# Altium PCB Rev(5).PCBDOC (part 1 of 3)
Units mm, origin at the board's own origin, x right, y up, seen from the top; angles counter-clockwise.
Board outline 161.79 x 99.5 mm, 4 copper layers (Top Layer, InternalPlane1, InternalPlane2, Bottom Layer); 374 components, 275 nets, 1404 pads, 444 vias.
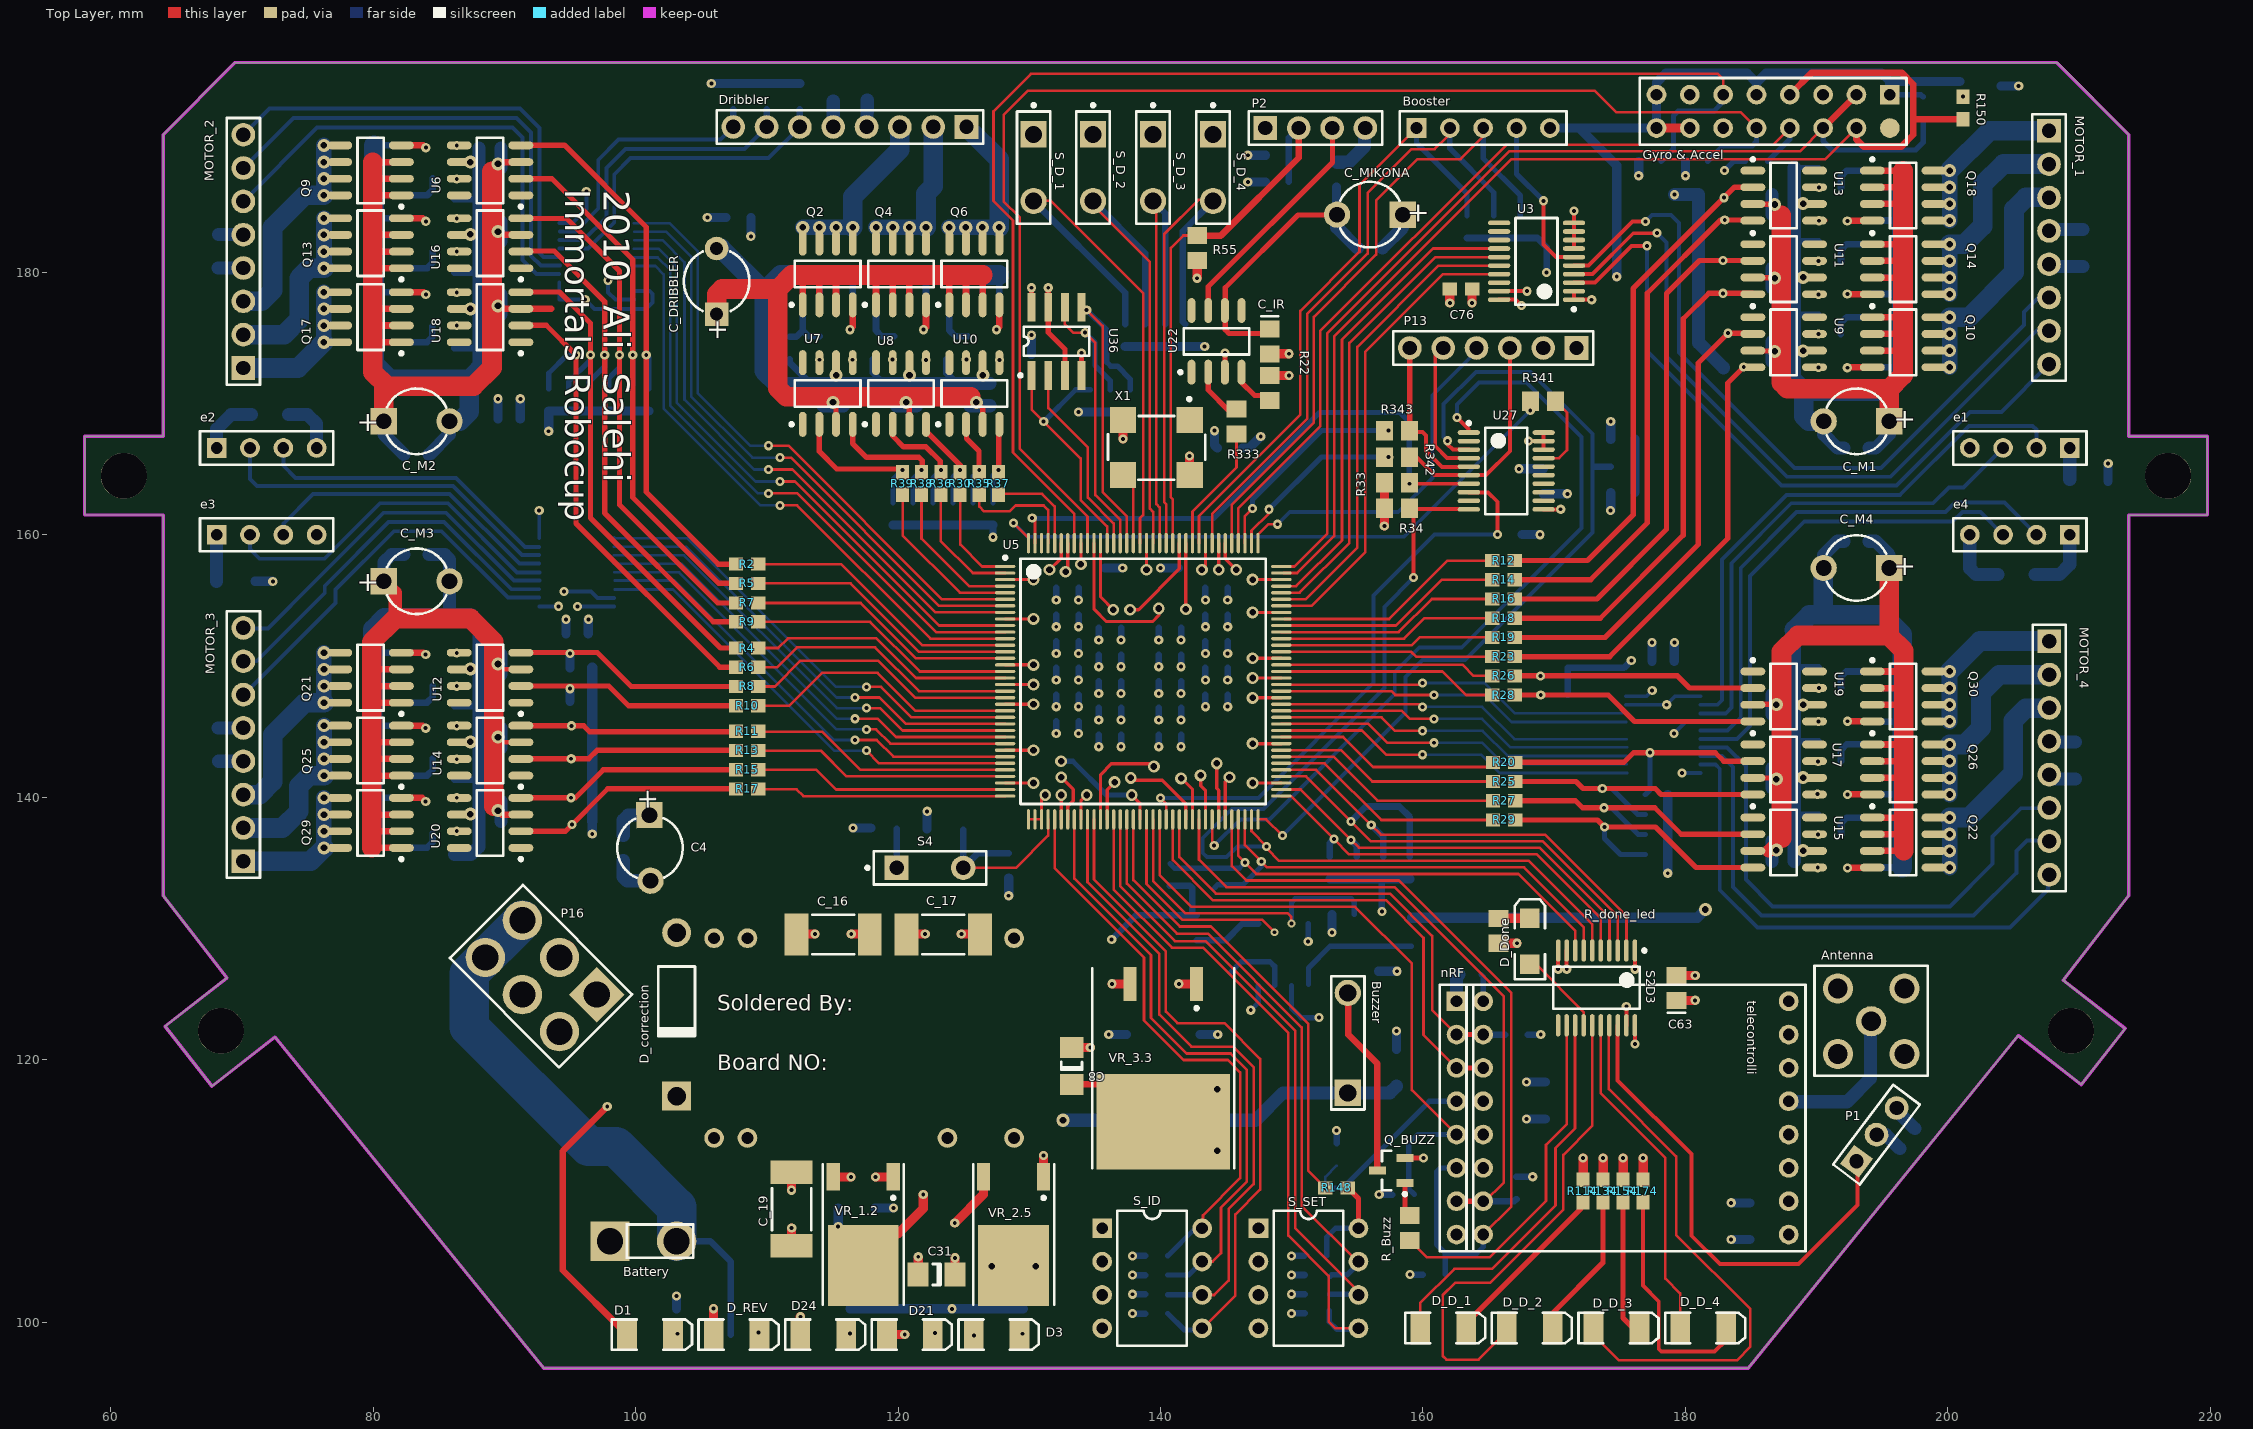
[diagram p0: Top Layer view]
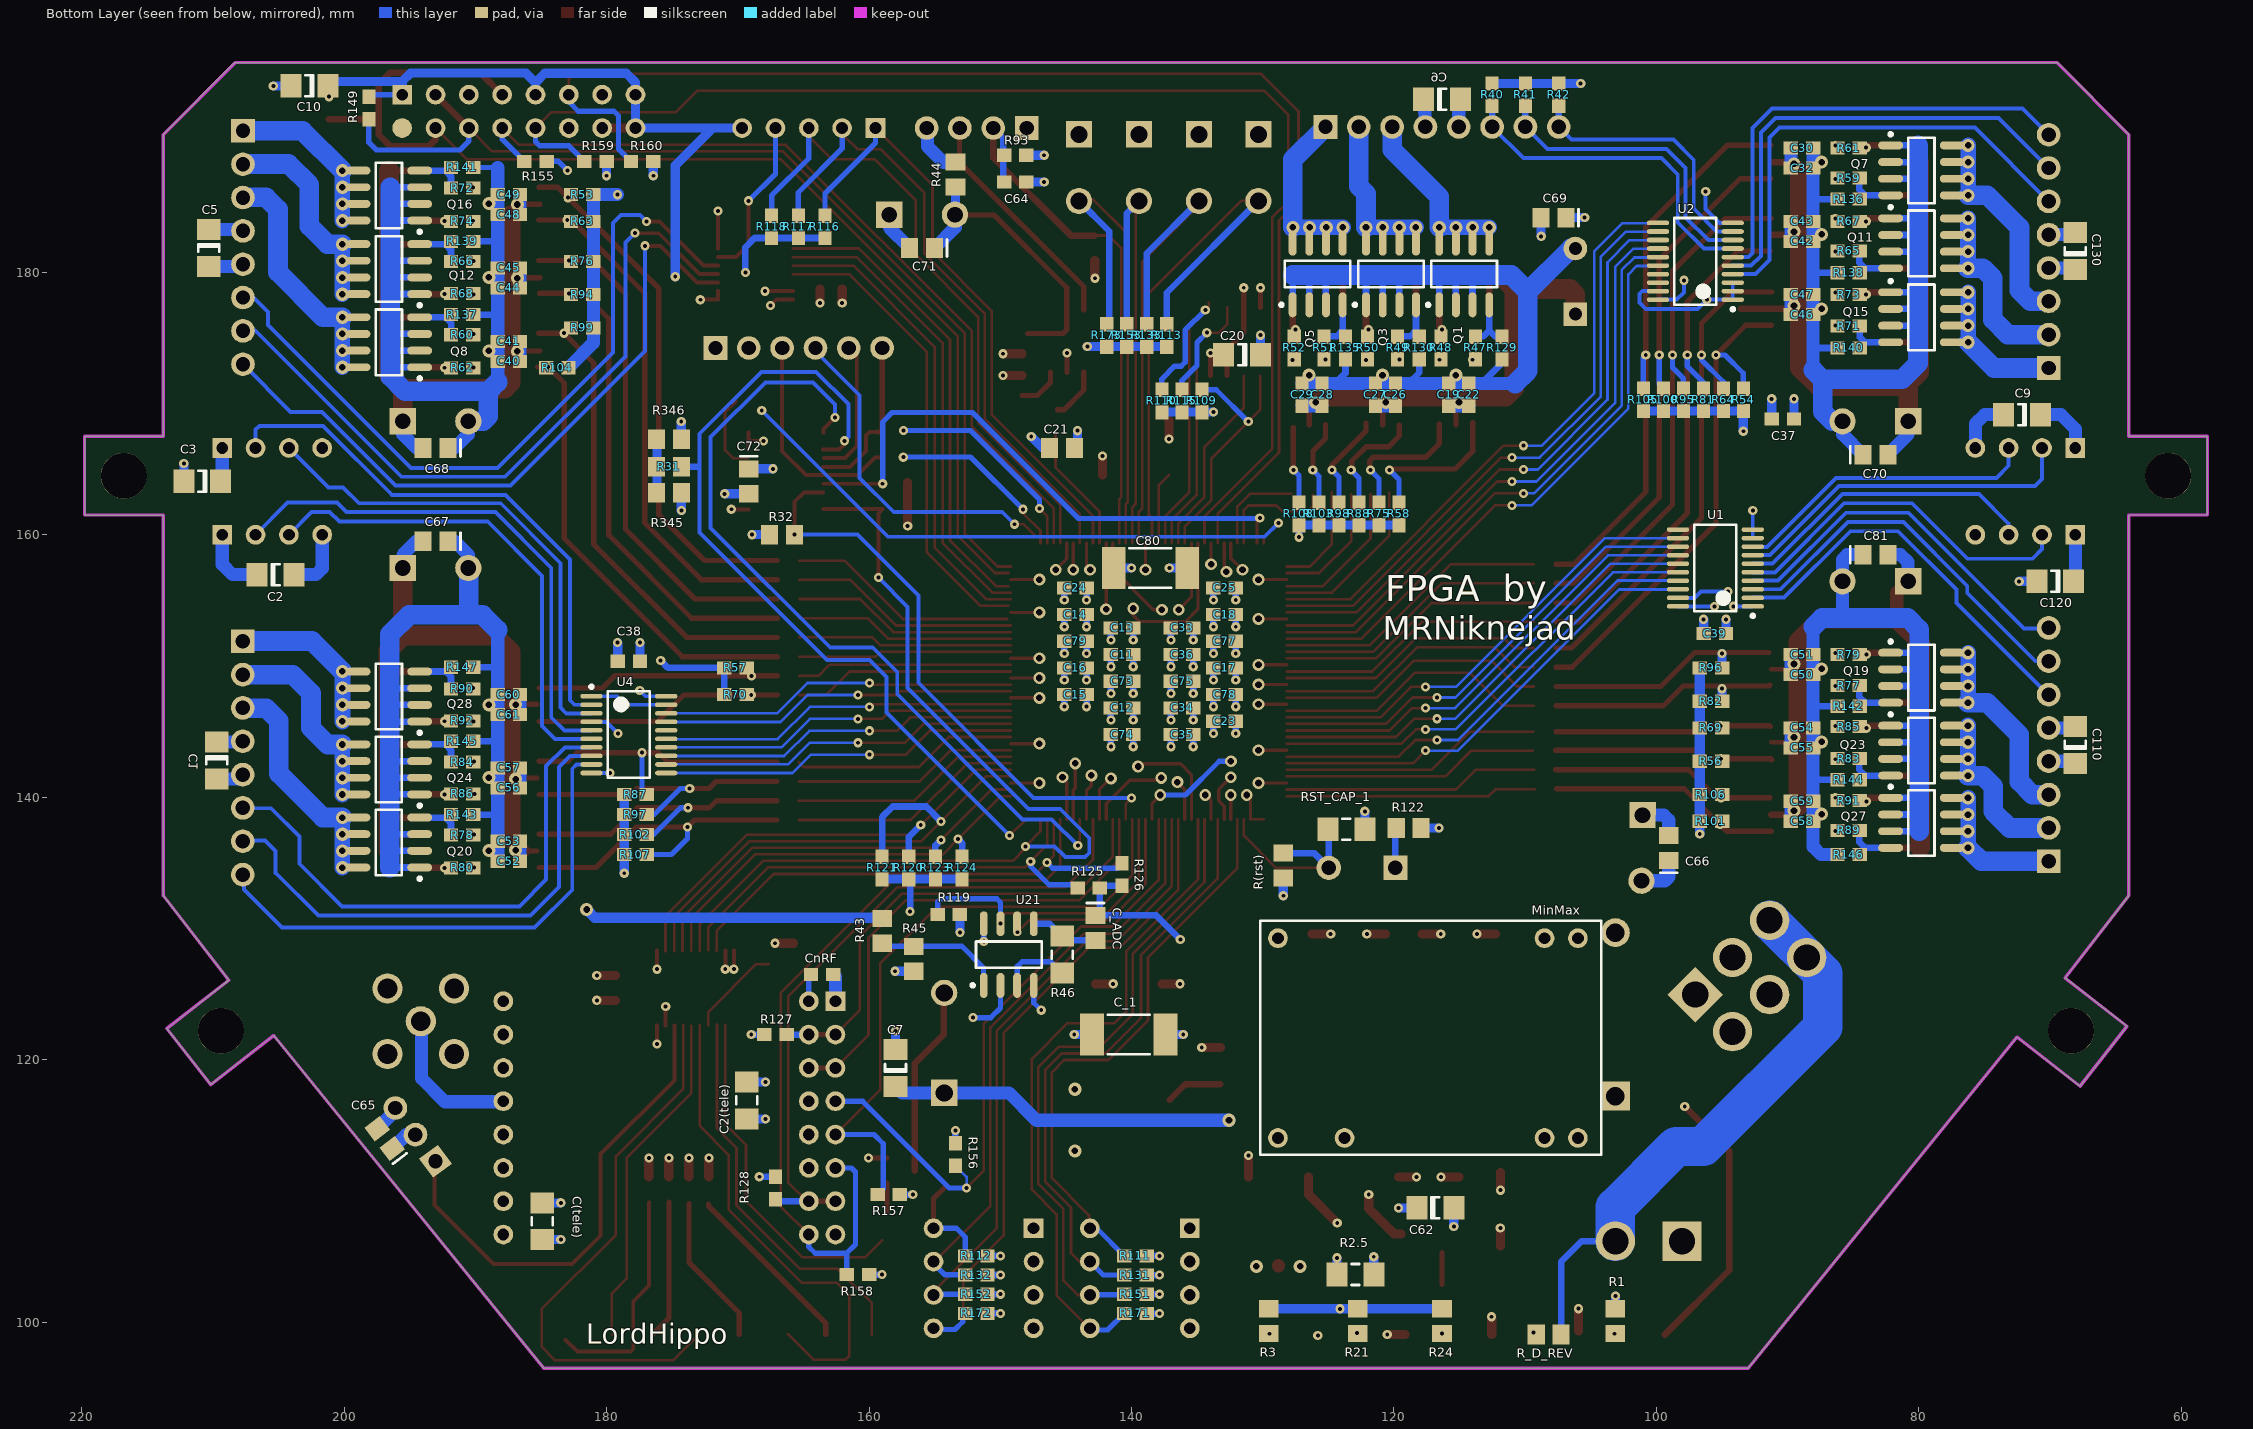
[diagram p1: Bottom Layer view, seen from below]
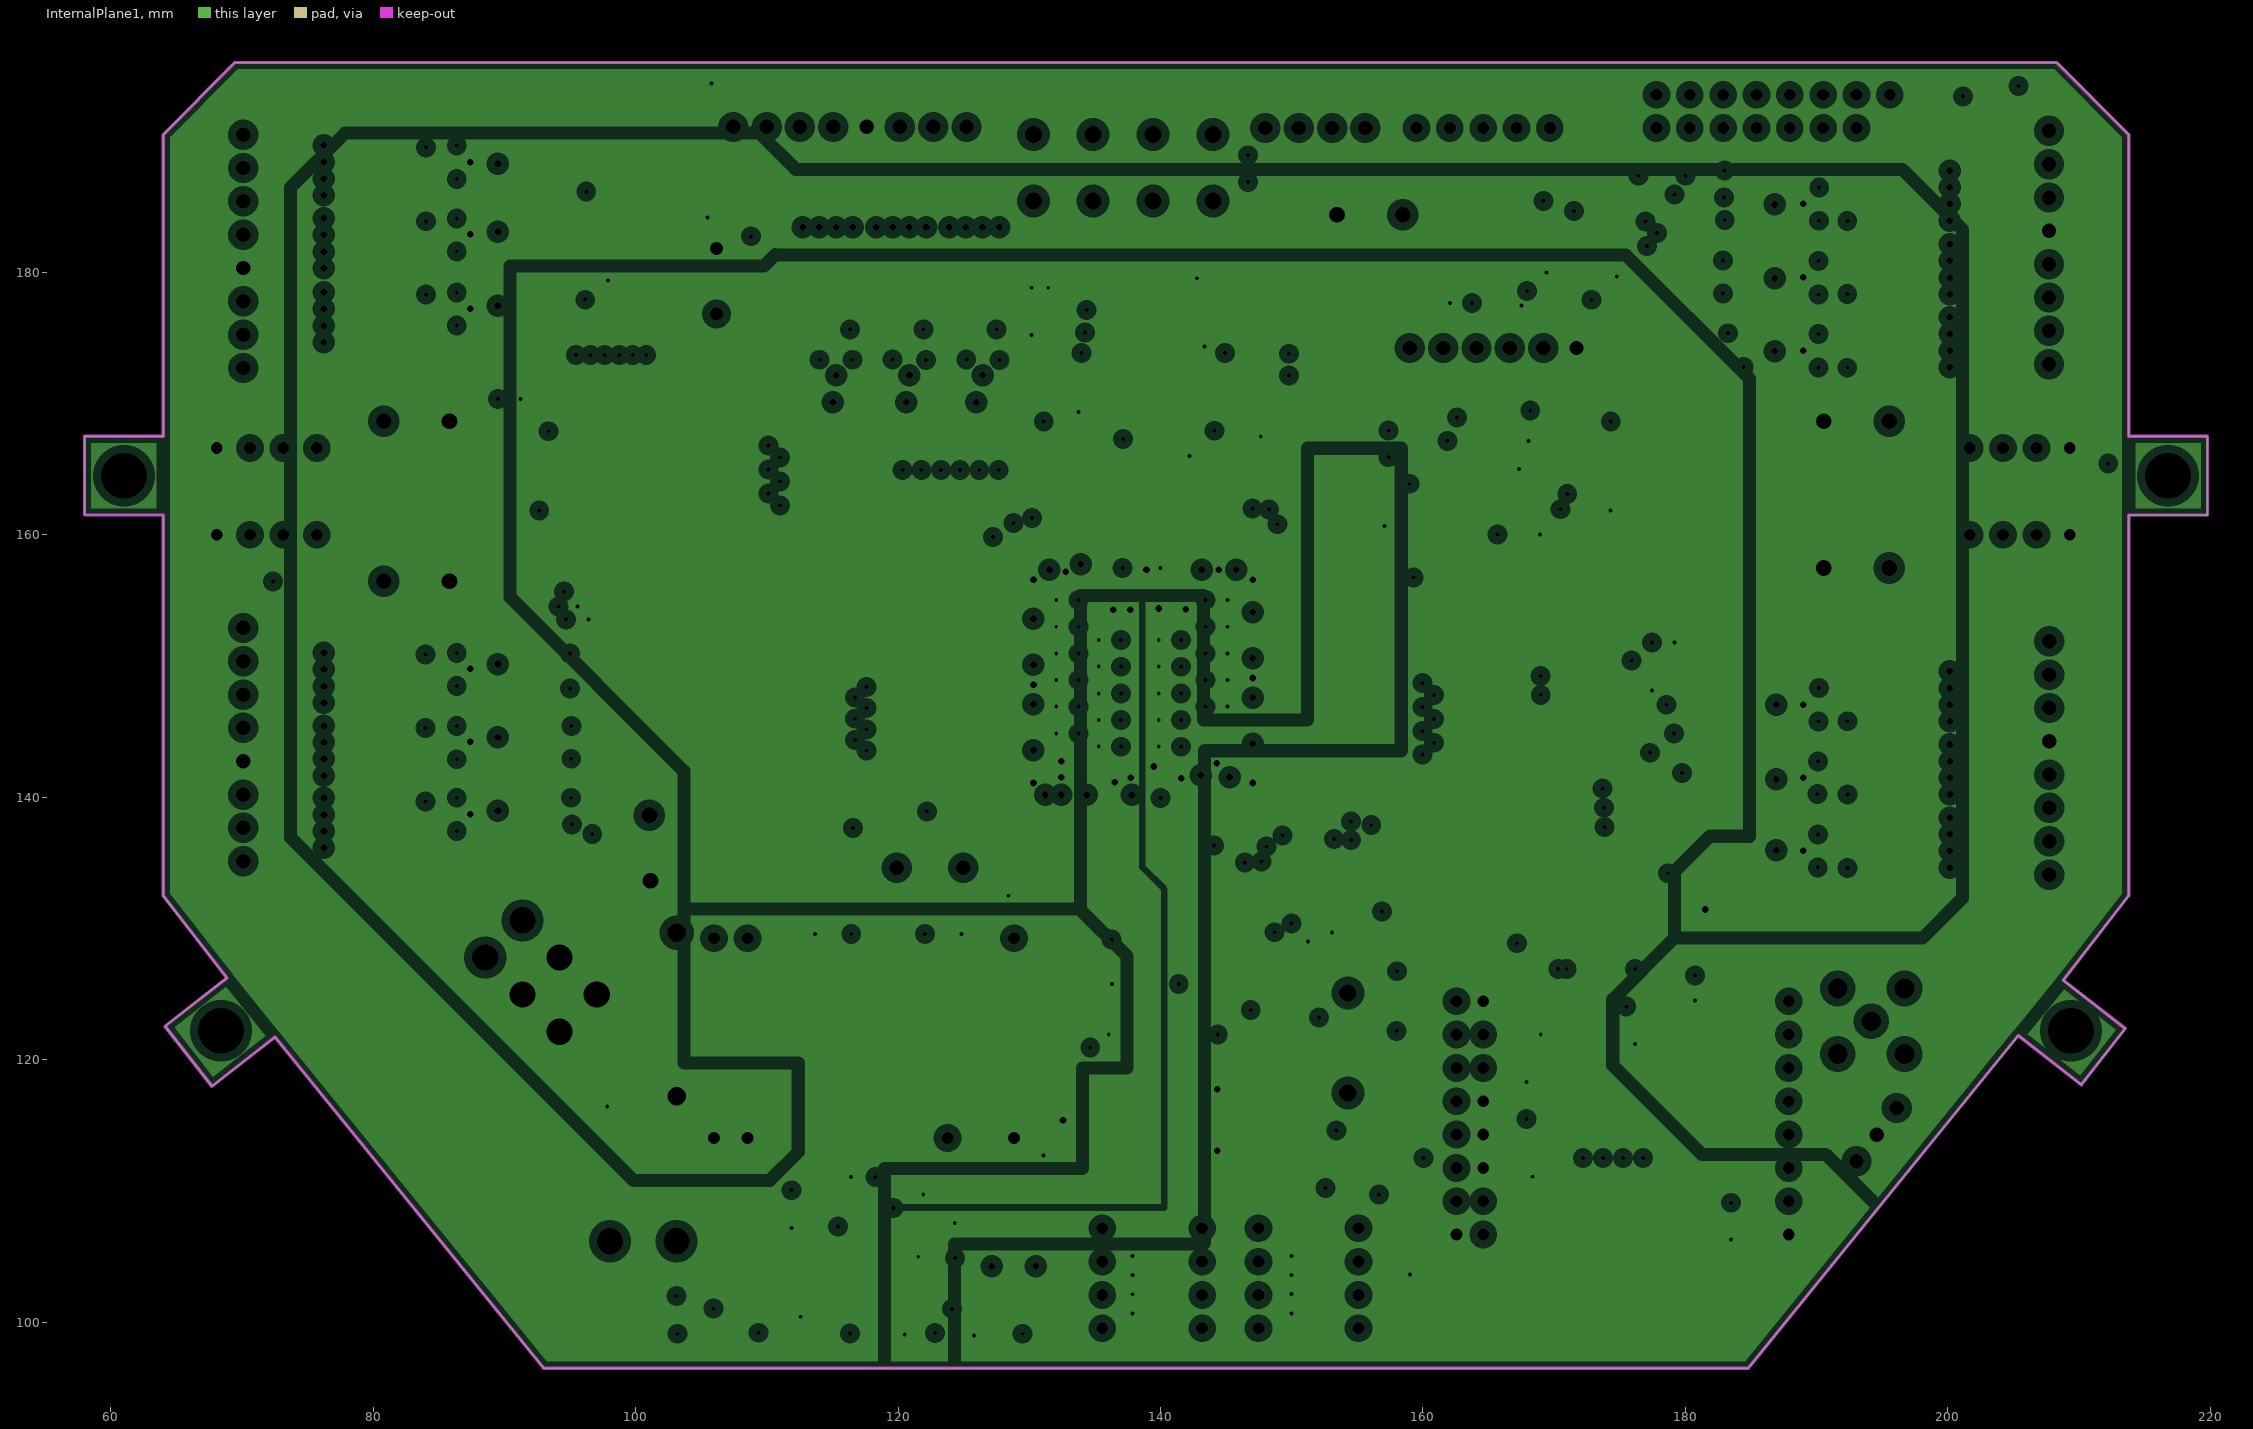
[diagram p2: InternalPlane1, clearances drawn from the general rule]
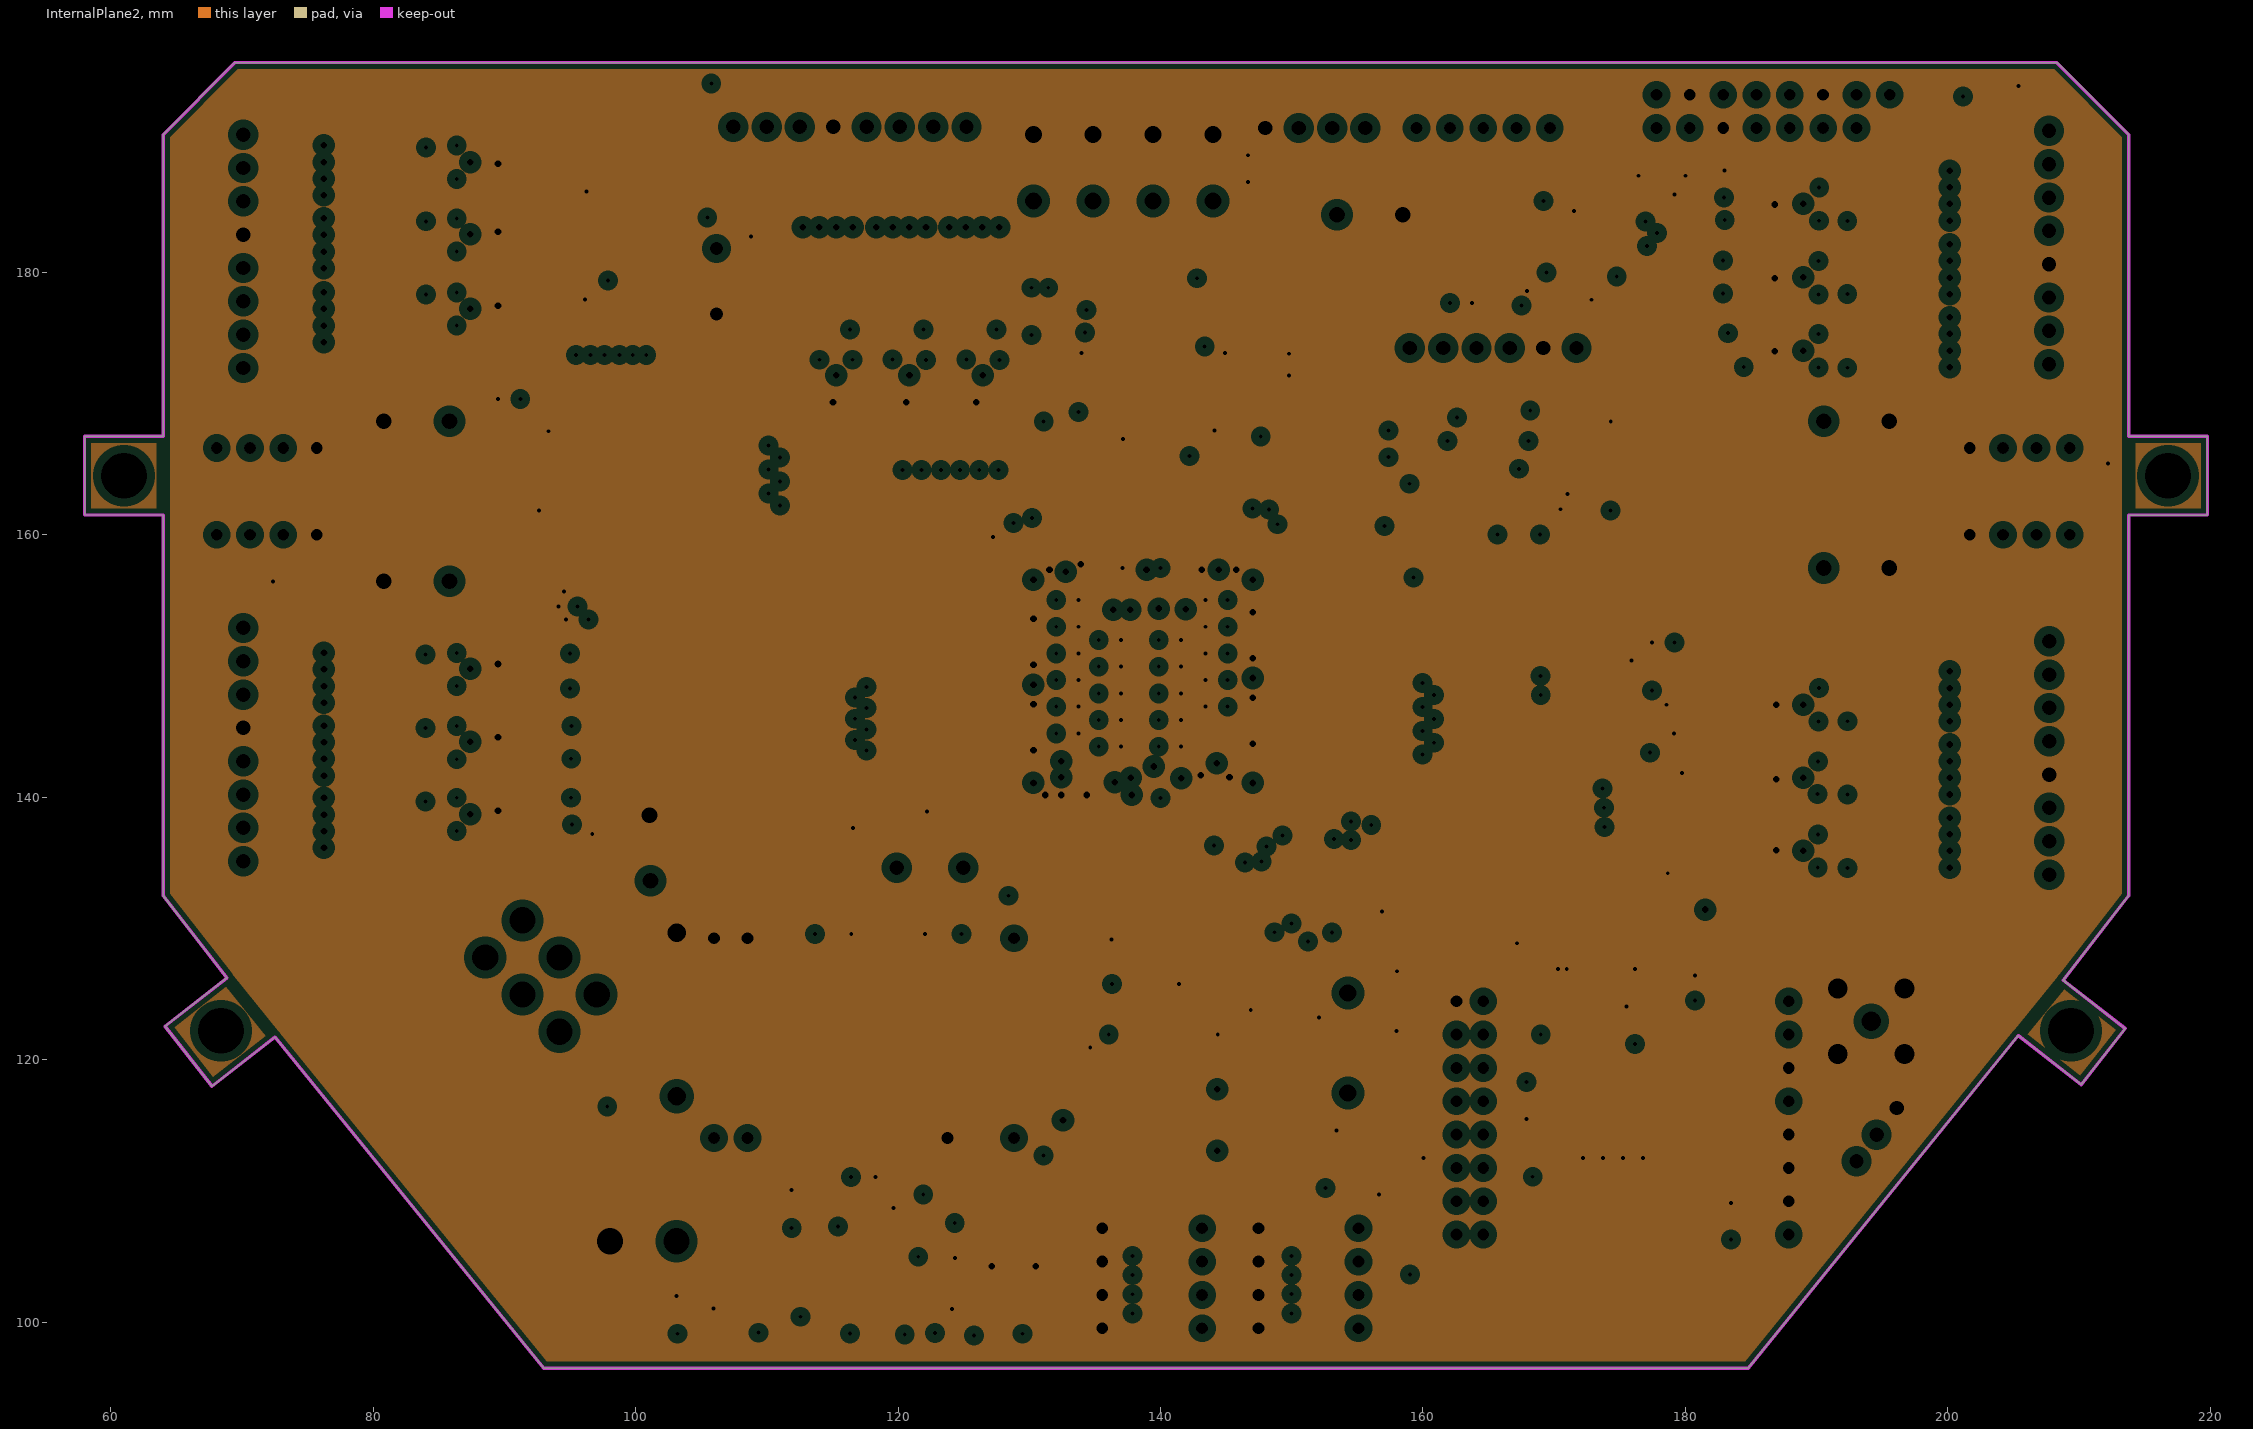
[diagram p3: InternalPlane2, clearances drawn from the general rule]

## Layer stack, top to bottom
Top Layer: signal copper 0.0356
Dielectric: core 0.32, FR-4, Dk 4.8
InternalPlane1: plane copper 0.0356, net (Multiple Nets)
Dielectric: prepreg 0.32, FR-4, Dk 4.8
InternalPlane2: plane copper 0.0356, net GND
Dielectric: core 0.32, FR-4, Dk 4.8
Bottom Layer: signal copper 0.0356

## Board outline
69.436,195.99 208.34,196 213.79,190.51 213.79,167.51 219.79,167.51 219.79,161.51 213.79,161.51 213.79,132.51 208.795,126.068 213.516,122.385 210.176,118.103 205.376,121.847 184.79,96.5 93,96.5 72.51,121.728 67.708,117.982 64.139,122.557 68.86,126.24 64,132.5 64,161.51 58,161.53 58,167.51 64,167.51 64,190.51

## Design rules (kind name [scope] priority, off if disabled: settings)
Clearance [InLCC] p1: gap=0.2
Clearance Clearance_1 [All] p2: gap=0.25
ComponentClearance [All] p1: gap=0.254 collisioncheckmode=3 verticalgap=0.254
HoleSize [All] p1: absolutevalues=TRUE maxlimit=4.54 minlimit=0.025 maxpercent=80.000 minpercent=20.000
PlaneClearance [All] p1: clearance=0.608
PlaneConnect PlaneConnect_1 [(ObjectKind = 'Via') And (ViaDiameter = '0.99')] p1: planeconnectstyle=NoConnect reliefexpansion=0.508 reliefentries=4 reliefconductorwidth=0.254 reliefairgap=0.254
PlaneConnect [All] p2: planeconnectstyle=Relief reliefexpansion=0.508 reliefentries=4 reliefconductorwidth=1 reliefairgap=0.254
PolygonConnect [All] p1: connectstyle=Relief reliefconductorwidth=0.74 reliefentries=4 polygonreliefangle="90 Angle"
RoomDefinition Sheet1 [InComponentClass('Sheet1')] p1: confinementstyle=ConfineIn formatcopy=TRUE lockcomponents=FALSE outline 227.95,77.61 238.11,77.61 238.11,90.3 227.95,90.3
RoutingVias [All] p1: holewidth=0.45 width=0.75 viastyle="Through Hole" minholewidth=0.3 minwidth=0.5 maxholewidth=0.7 maxwidth=1
SMDNeckDown [All] p1: percent=70.000
SolderMaskExpansion [All] p1: expansion=0.102
SupplyNets [All] p1: voltage=14.80
TestPointUsage [All] p1: valid=0 allowmultiple=FALSE
Testpoint [All] p1: side=15 testpointundercomponent=TRUE minsize=1.016 maxsize=2.54 preferedsize=1.524 minholesize=0 maxholesize=1.016 preferedholesize=0.813 testpointgrid=0.025 style=1023 order=0123456789
Width [All] p1: maxlimit=4 minlimit=0.2 preferedwidth=0.4 toplayer_prefwidth=0.2 bottomlayer_prefwidth=0.2 minimp=50.000000 maximp=50.000000 favimp=50.000000
15 further rules are at their usual default settings.

## Components (designator, comment, footprint, x,y, rotation, side; value= is the part's Value field where it differs from the comment)
Antenna "Header 5" Antenna 194.11,122.936 r0 top
Battery "Header 2" HDR1X2 100.584,106.172 r0 top
Booster "Header 5" HDR1X5 159.512,191.008 r0 top
Buzzer "Header 4" HDR1X4#1 154.272,117.478 r90 top
C1 "100nF" C1206 209.724,142.808 r270 bottom
C2 "100nF" C1206 205.232,156.972 r180 bottom
C2(tele) "Cap" 3216[1206] 169.316,116.896 r270 bottom
C3 "100nF" C1206 210.82,164.084 r0 bottom
C4 "CRip4" CAPPR5-5x5#1 101.092,136.144 r271 top
C5 "100nF" C1206 210.312,181.864 r270 bottom
C6 "100nF" C1206 116.332,193.2 r180 bottom
C7 "100nF" C1206 157.988,119.38 r90 bottom
C8 "CNoise8" C1206 133.222,119.53 r90 top
C9 "100nF" C1206 72.136,169.164 r0 bottom
C10 "100nF" C1206 202.648,194.218 r0 bottom
C11 "Cap Semi" 1608[0603] 140.716,150.876 r180 bottom
C12 "Cap Semi" 1608[0603] 140.716,146.812 r180 bottom
C13 "Cap Semi" 1608[0603] 140.716,152.908 r180 bottom
C14 "Cap Semi" 1608[0603] 144.272,153.924 r0 bottom
C15 "Cap Semi" 1608[0603] 144.272,147.828 r0 bottom
C16 "Cap Semi" 1608[0603] 144.272,149.86 r0 bottom
C17 "Cap Semi" 1608[0603] 132.906,149.86 r180 bottom
C18 "Cap Semi" 1608[0603] 132.906,153.924 r180 bottom
C19 "Cap Semi" 1608[0603] 115.824,170.688 r90 bottom
C20 "100nF" C1206 131.572,173.736 r0 bottom
C21 "100nf" 2012[0805] 145.288,166.624 r180 bottom
C22 "Cap Semi" 1608[0603] 114.3,170.688 r90 bottom
C23 "Cap Semi" 1608[0603] 132.906,145.796 r180 bottom
C24 "Cap Semi" 1608[0603] 144.272,155.956 r0 bottom
C25 "Cap Semi" 1608[0603] 132.906,155.956 r180 bottom
C26 "Cap Semi" 1608[0603] 119.888,170.688 r90 bottom
C27 "Cap Semi" 1608[0603] 121.412,170.688 r90 bottom
C28 "Cap Semi" 1608[0603] 125.476,170.688 r90 bottom
C29 "Cap Semi" 1608[0603] 127,170.688 r90 bottom
C30 "Cap Semi" 1608[0603] 88.9,189.484 r180 bottom
C31 "CNoise6" C1206 122.936,103.632 r180 top
C32 "Cap Semi" 1608[0603] 88.9,187.96 r180 bottom
C33 "Cap Semi" 1608[0603] 136.144,152.908 r180 bottom
C34 "Cap Semi" 1608[0603] 136.144,146.812 r180 bottom
C35 "Cap Semi" 1608[0603] 136.144,144.78 r180 bottom
C36 "Cap Semi" 1608[0603] 136.144,150.876 r180 bottom
C37 "Cap Semi" 1608[0603] 90.36,168.824 r0 bottom
C38 "Cap Semi" 1608[0603] 178.308,150.368 r0 bottom
C39 "Cap Semi" 1608[0603] 95.544,152.472 r0 bottom
C40 "Cap Semi" 1608[0603] 187.452,173.228 r0 bottom
C41 "Cap Semi" 1608[0603] 187.452,174.752 r0 bottom
C42 "Cap Semi" 1608[0603] 88.9,182.372 r180 bottom
C43 "Cap Semi" 1608[0603] 88.9,183.896 r180 bottom
C44 "Cap Semi" 1608[0603] 187.452,178.816 r0 bottom
C45 "Cap Semi" 1608[0603] 187.452,180.34 r0 bottom
C46 "Cap Semi" 1608[0603] 88.9,176.784 r180 bottom
C47 "Cap Semi" 1608[0603] 88.9,178.308 r180 bottom
C48 "Cap Semi" 1608[0603] 187.452,184.404 r0 bottom
C49 "Cap Semi" 1608[0603] 187.452,185.928 r0 bottom
C50 "Cap Semi" 1608[0603] 88.9,149.352 r180 bottom
C51 "Cap Semi" 1608[0603] 88.9,150.876 r180 bottom
C52 "Cap Semi" 1608[0603] 187.452,135.128 r0 bottom
C53 "Cap Semi" 1608[0603] 187.452,136.652 r0 bottom
C54 "Cap Semi" 1608[0603] 88.9,145.288 r180 bottom
C55 "Cap Semi" 1608[0603] 88.9,143.764 r180 bottom
C56 "Cap Semi" 1608[0603] 187.452,140.716 r0 bottom
C57 "Cap Semi" 1608[0603] 187.452,142.24 r0 bottom
C58 "Cap Semi" 1608[0603] 88.9,138.176 r180 bottom
C59 "Cap Semi" 1608[0603] 88.9,139.7 r180 bottom
C60 "Cap Semi" 1608[0603] 187.452,147.828 r0 bottom
C61 "Cap Semi" 1608[0603] 187.452,146.304 r0 bottom
C62 "CNoise6" C1206 116.84,108.712 r180 bottom
C63 "100nF" C0805 179.324,125.476 r90 top
C64 "Cap Semi" 1608[0603] 148.858,186.898 r0 bottom
C65 "100nF" C0805 196.914,113.99 r53 bottom
C66 "100nF" C0805 99.06,136.144 r90 bottom
C67 "100nF" C0805 193.04,159.512 r0 bottom
C68 "100nF" C0805 193.04,166.624 r0 bottom
C69 "100nF" C0805 107.834,184.178 r0 bottom
C70 "100nF" C0805 83.312,166.116 r180 bottom
C71 "100nF" C0805 155.956,181.864 r0 bottom
C72 "100nF" C0805 169.164,164.084 r270 bottom
C73 "Cap Semi" 1608[0603] 140.716,148.844 r180 bottom
C74 "Cap Semi" 1608[0603] 140.716,144.78 r180 bottom
C75 "Cap Semi" 1608[0603] 136.144,148.844 r180 bottom
C76 "Cap Semi" 1608[0603] 162.898,178.734 r180 top
C77 "Cap Semi" 1608[0603] 132.906,151.892 r180 bottom
C78 "Cap Semi" 1608[0603] 132.906,147.828 r180 bottom
C79 "Cap Semi" 1608[0603] 144.272,151.892 r0 bottom
C80 "Cap Pol1" 6332[2512] 138.564,157.48 r180 bottom
C81 "100nF" C0805 83.312,158.496 r180 bottom
C110 "100nF" C1206 68.072,143.992 r90 bottom
C120 "100nF" C1206 69.596,156.464 r0 bottom
C130 "100nF" C1206 68.072,181.634 r90 bottom
C(tele) "Cap" 3216[1206] 184.912,107.696 r90 bottom
C_1 "Cap Pol1" 6332[2512] 140.208,121.92 r0 bottom
C_16 "Cap Pol1" 6332[2512] 115.056,129.54 r0 top
C_17 "Cap Pol1" 6332[2512] 123.444,129.54 r180 top
C_19 "Cap Pol1" 6332[2512] 111.89,108.614 r90 top
C_ADC "100nF" C0805 142.748,130.048 r270 bottom
C_DRIBBLER "CRip4" CAPPR5-5x5#2 106.172,179.324 r90 top
C_IR "100nF" C0805 148.336,174.752 r270 top
C_M1 "CRip4" CAPPR5-5x5#1 193.04,168.656 r180 top
C_M2 "CRip4" CAPPR5-5x5#1 83.312,168.656 r0 top
C_M3 "CRip4" CAPPR5-5x5#1 83.312,156.464 r0 top
C_M4 "CRip4" CAPPR5-5x5#1 193.04,157.48 r180 top
C_MIKONA "CRip4" CAPPR5-5x5#1 155.956,184.404 r180 top
CnRF "Cap Semi" 1608[0603] 163.576,126.492 r0 bottom
D1 "LED2" 3.2X1.6X1.1#1 101.092,99.06 r0 top
D3 "LED2" 3.2X1.6X1.1#1 127.508,99.06 r0 top
D21 "LED2" 3.2X1.6X1.1#1 120.904,99.06 r0 top
D24 "LED2" 3.2X1.6X1.1#1 114.3,99.06 r0 top
D_correction "Diode 1N4001" DO-41 103.124,124.46 r270 top
D_D_1 "LED2" 3.2X1.6X1.1#1 161.544,99.56 r0 top
D_D_2 "LED2" 3.2X1.6X1.1#1 168.148,99.56 r0 top
D_D_3 "LED2" 3.2X1.6X1.1#1 174.752,99.56 r0 top
D_D_4 "LED2" 3.2X1.6X1.1#1 181.356,99.56 r0 top
D_Done "LED2" 3.2X1.6X1.1#2 168.148,129.032 r90 top
D_REV "LED2" 3.2X1.6X1.1#1 107.696,99.06 r0 top
Dribbler "Header 8" HDR1X8#1 125.218,191.088 r180 top
e1 "Header 4" HDR1X4#2 209.296,166.624 r180 top
e2 "Header 4" HDR1X4#2 68.072,166.624 r0 top
e3 "Header 4" HDR1X4#2 68.072,160.012 r0 top
e4 "Header 4" HDR1X4#2 209.296,160.012 r180 top
"Gyro & Accel" "ITG-3200/BMA180" HDR2X8 195.58,193.548 r180 top
MinMax "Header 12X2" MIW5000 128.842,114.042 r180 bottom
MOTOR_1 "Header 8" HDR1X8#1 207.714,190.79 r270 top
MOTOR_2 "Header 8" HDR1X8#1 70.104,172.72 r90 top
MOTOR_3 "Header 8" HDR1X8#1 70.104,135.128 r90 top
MOTOR_4 "Header 8" HDR1X8#1 207.732,151.892 r270 top
nRF "Header 8" HDR1X8#2 162.56,124.46 r270 top
P1 "Header 3" HDR1X3 193.04,112.268 r53 top
P2 "Header 4" HDR1X4#3 147.996,191.008 r0 top
P13 "Header 6" HDR1X6 171.704,174.244 r180 top
P16 "Header 3X2" Kolang 97.028,124.968 r135 top
Q1 "IRF7204" SO-8_L 114.644,179.881 r90 bottom
Q2 "IRF7201" SO-8_L 114.638,179.881 r90 top
Q3 "IRF7204" SO-8_L 120.222,179.881 r90 bottom
Q4 "IRF7201" SO-8_L 120.226,179.881 r90 top
Q5 "IRF7204" SO-8_L 125.816,179.881 r90 bottom
Q6 "IRF7201" SO-8_L 125.814,179.881 r90 top
Q7 "IRF7204" SO-8_L 79.8,187.78 r180 bottom
Q8 "IRF7204" SO-8_L 196.596,174.678 r0 bottom
Q9 "IRF7201" SO-8_L 79.8,187.778 r180 top
Q10 "IRF7201" SO-8_L 196.596,174.678 r0 top
Q11 "IRF7204" SO-8_L 79.8,182.221 r180 bottom
Q12 "IRF7204" SO-8_L 196.596,180.256 r0 bottom
Q13 "IRF7201" SO-8_L 79.8,182.226 r180 top
Q14 "IRF7201" SO-8_L 196.596,180.248 r0 top
Q15 "IRF7204" SO-8_L 79.8,176.585 r180 bottom
Q16 "IRF7204" SO-8_L 196.596,185.858 r0 bottom
Q17 "IRF7201" SO-8_L 79.8,176.59 r180 top
Q18 "IRF7201" SO-8_L 196.596,185.856 r0 top
Q19 "IRF7204" SO-8_L 79.8,149.12 r180 bottom
Q20 "IRF7204" SO-8_L 196.6,136.558 r0 bottom
Q21 "IRF7201" SO-8_L 79.8,149.116 r180 top
Q22 "IRF7201" SO-8_L 196.596,136.552 r0 top
Q23 "IRF7204" SO-8_L 79.8,143.562 r180 bottom
Q24 "IRF7204" SO-8_L 196.6,142.128 r0 bottom
Q25 "IRF7201" SO-8_L 79.8,143.56 r180 top
Q26 "IRF7201" SO-8_L 196.596,142.122 r0 top
Q27 "IRF7204" SO-8_L 79.8,138.052 r180 bottom
Q28 "IRF7204" SO-8_L 196.596,147.678 r0 bottom
Q29 "IRF7201" SO-8_L 79.8,138.05 r180 top
Q30 "IRF7201" SO-8_L 196.596,147.69 r0 top
Q_BUZZ "PMBTA14" SOT23_N 157.577,111.563 r180 top
R1 "Res2" 2012[0805] 103.124,100.076 r90 bottom
R2 "Res Semi" 1608[0603] 108.5,157.772 r0 top
R2.5 "Res Semi" 3216[1206] 122.936,103.632 r180 bottom
R3 "Res2" 2012[0805] 129.54,100.076 r270 bottom
R4 "Res Semi" 1608[0603] 108.5,151.376 r0 top
R5 "Res Semi" 1608[0603] 108.5,156.308 r0 top
R6 "Res Semi" 1608[0603] 108.5,149.912 r0 top
R7 "Res Semi" 1608[0603] 108.5,154.814 r0 top
R8 "Res Semi" 1608[0603] 108.5,148.448 r0 top
R9 "Res Semi" 1608[0603] 108.5,153.38 r0 top
R10 "Res Semi" 1608[0603] 108.5,146.984 r0 top
R11 "Res Semi" 1608[0603] 108.5,145.034 r0 top
R12 "Res Semi" 1608[0603] 166.148,158.044 r0 top
R13 "Res Semi" 1608[0603] 108.5,143.57 r0 top
R14 "Res Semi" 1608[0603] 166.148,156.58 r0 top
R15 "Res Semi" 1608[0603] 108.5,142.106 r0 top
R16 "Res Semi" 1608[0603] 166.148,155.116 r0 top
R17 "Res Semi" 1608[0603] 108.5,140.642 r0 top
R18 "Res Semi" 1608[0603] 166.148,153.652 r0 top
R19 "Res Semi" 1608[0603] 166.148,152.186 r0 top
R20 "Res Semi" 1608[0603] 166.188,142.668 r0 top
R21 "Res2" 2012[0805] 122.76,100.076 r270 bottom
R22 "Res Semi" 2012[0805] 148.336,171.196 r90 top
R23 "Res Semi" 1608[0603] 166.148,150.722 r0 top
R24 "Res2" 2012[0805] 116.332,100.076 r270 bottom
R25 "Res Semi" 1608[0603] 166.188,141.204 r0 top
R26 "Res Semi" 1608[0603] 166.148,149.258 r0 top
R27 "Res Semi" 1608[0603] 166.188,139.74 r0 top
R28 "Res Semi" 1608[0603] 166.148,147.794 r0 top
R29 "Res Semi" 1608[0603] 166.188,138.276 r0 top
R30 "Res Semi" 1608[0603] 124.724,163.91 r90 top
R31 "Res Semi" 2012[0805] 175.26,165.19 r0 bottom
R32 "Res Semi" 2012[0805] 166.624,160.02 r180 bottom
R33 "Res Semi" 2012[0805] 158.012,163.968 r180 top
R34 "Res Semi" 2012[0805] 158.012,162.024 r0 top
R35 "Res Semi" 1608[0603] 126.188,163.91 r90 top
R36 "Res Semi" 1608[0603] 123.26,163.91 r90 top
R37 "Res Semi" 1608[0603] 127.652,163.91 r90 top
R38 "Res Semi" 1608[0603] 121.796,163.91 r90 top
R39 "Res Semi" 1608[0603] 120.332,163.91 r90 top
R40 "Res Semi" 1608[0603] 112.518,193.548 r270 bottom
R41 "Res Semi" 1608[0603] 109.978,193.548 r270 bottom
R42 "Res Semi" 1608[0603] 107.438,193.548 r270 bottom
R43 "Res2" 2012[0805] 159.004,129.828 r90 bottom
R44 "Res Semi" 2012[0805] 153.416,187.462 r270 bottom
R45 "Res2" 2012[0805] 156.604,127.696 r90 bottom
R46 "Res Semi" 3216[1206] 145.288,128.016 r270 bottom
R47 "Res Semi" 1608[0603] 113.792,174.244 r90 bottom
R48 "Res Semi" 1608[0603] 116.422,174.244 r90 bottom
R49 "Res Semi" 1608[0603] 119.718,174.244 r90 bottom
R50 "Res Semi" 1608[0603] 122.01,174.244 r90 bottom
R51 "Res Semi" 1608[0603] 125.326,174.244 r90 bottom
R52 "Res Semi" 1608[0603] 127.598,174.244 r90 bottom
R53 "Res Semi" 1608[0603] 181.864,185.928 r180 bottom
R54 "Res Semi" 1608[0603] 93.374,170.294 r270 bottom
R55 "Res Semi" 2012[0805] 142.796,181.864 r270 top
R56 "Res Semi" 1608[0603] 95.846,142.748 r0 bottom
R57 "Res Semi" 1608[0603] 170.18,149.86 r0 bottom
R58 "Res Semi" 1608[0603] 119.616,161.598 r270 bottom
R59 "Res Semi" 1608[0603] 85.344,187.194 r180 bottom
R60 "Res Semi" 1608[0603] 191.008,175.25 r0 bottom
R61 "Res Semi" 1608[0603] 85.344,189.484 r180 bottom
R62 "Res Semi" 1608[0603] 191.008,172.72 r0 bottom
R63 "Res Semi" 1608[0603] 181.864,183.896 r180 bottom
R64 "Res Semi" 1608[0603] 94.898,170.294 r270 bottom
R65 "Res Semi" 1608[0603] 85.344,181.636 r180 bottom
R66 "Res Semi" 1608[0603] 191.008,180.848 r0 bottom
R67 "Res Semi" 1608[0603] 85.344,183.896 r180 bottom
R68 "Res Semi" 1608[0603] 191.008,178.388 r0 bottom
R69 "Res Semi" 1608[0603] 95.846,145.288 r0 bottom
R70 "Res Semi" 1608[0603] 170.18,147.828 r0 bottom
R71 "Res Semi" 1608[0603] 85.344,175.908 r180 bottom
R72 "Res Semi" 1608[0603] 191.008,186.436 r0 bottom
R73 "Res Semi" 1608[0603] 85.344,178.308 r180 bottom
R74 "Res Semi" 1608[0603] 191.008,183.886 r0 bottom
R75 "Res Semi" 1608[0603] 121.14,161.598 r270 bottom
R76 "Res Semi" 1608[0603] 181.864,180.848 r180 bottom
R77 "Res Semi" 1608[0603] 85.344,148.516 r180 bottom
R78 "Res Semi" 1608[0603] 191.008,137.12 r0 bottom
R79 "Res Semi" 1608[0603] 85.344,150.876 r180 bottom
R80 "Res Semi" 1608[0603] 191.008,134.62 r0 bottom
R81 "Res Semi" 1608[0603] 96.422,170.294 r270 bottom
R82 "Res Semi" 1608[0603] 95.846,147.32 r0 bottom
R83 "Res Semi" 1608[0603] 85.344,142.948 r180 bottom
R84 "Res Semi" 1608[0603] 191.008,142.688 r0 bottom
R85 "Res Semi" 1608[0603] 85.344,145.398 r180 bottom
R86 "Res Semi" 1608[0603] 191.008,140.268 r0 bottom
R87 "Res Semi" 1608[0603] 177.8,140.208 r0 bottom
R88 "Res Semi" 1608[0603] 122.664,161.598 r270 bottom
R89 "Res Semi" 1608[0603] 85.344,137.48 r180 bottom
R90 "Res Semi" 1608[0603] 191.008,148.256 r0 bottom
R91 "Res Semi" 1608[0603] 85.344,139.75 r180 bottom
R92 "Res Semi" 1608[0603] 191.008,145.826 r0 bottom
R93 "Res Semi" 1608[0603] 148.858,188.93 r0 bottom
R94 "Res Semi" 1608[0603] 181.864,178.308 r180 bottom
R95 "Res Semi" 1608[0603] 97.946,170.294 r270 bottom
R96 "Res Semi" 1608[0603] 95.846,149.86 r0 bottom
R97 "Res Semi" 1608[0603] 177.8,138.684 r0 bottom
R98 "Res Semi" 1608[0603] 124.188,161.598 r270 bottom
R99 "Res Semi" 1608[0603] 181.864,175.768 r180 bottom
R100 "Res Semi" 1608[0603] 99.47,170.294 r270 bottom
R101 "Res Semi" 1608[0603] 95.846,138.176 r0 bottom
R102 "Res Semi" 1608[0603] 177.8,137.16 r0 bottom
R103 "Res Semi" 1608[0603] 125.712,161.598 r270 bottom
R104 "Res Semi" 1608[0603] 183.756,172.74 r180 bottom
R105 "Res Semi" 1608[0603] 100.994,170.294 r270 bottom
R106 "Res Semi" 1608[0603] 95.846,140.208 r0 bottom
R107 "Res Semi" 1608[0603] 177.8,135.636 r0 bottom
R108 "Res Semi" 1608[0603] 127.236,161.598 r270 bottom
R109 "Res Semi" 1608[0603] 134.638,170.212 r90 bottom
R110 "Res Semi" 1608[0603] 137.686,170.212 r90 bottom
R111 "Res Semi" 1608[0603] 139.7,105.058 r180 bottom
R112 "Res Semi" 1608[0603] 151.822,105.058 r180 bottom
R113 "Res Semi" 1608[0603] 137.314,175.2 r270 bottom
R114 "Res Semi" 1608[0603] 172.198,109.99 r90 top
R115 "Res Semi" 1608[0603] 136.162,170.212 r270 bottom
R116 "Res Semi" 1608[0603] 163.36,183.476 r90 bottom
R117 "Res Semi" 1608[0603] 165.392,183.476 r90 bottom
R118 "Res Semi" 1608[0603] 167.424,183.476 r90 bottom
R119 "Res Semi" 1608[0603] 153.924,131.064 r0 bottom
R120 "Res Semi" 1608[0603] 156.972,134.62 r270 bottom
R121 "Res Semi" 1608[0603] 159.004,134.62 r270 bottom
R122 "Res1" 2012[0805] 118.872,137.668 r0 bottom
R123 "Res Semi" 1608[0603] 154.94,134.62 r270 bottom
R124 "Res Semi" 1608[0603] 152.908,134.62 r270 bottom
R125 "Res Semi" 1608[0603] 143.256,133.096 r180 bottom
R126 "Res Semi" 1608[0603] 140.716,134.112 r270 bottom
R127 "Res Semi" 1608[0603] 167.132,121.92 r180 bottom
R128 "Res Semi" 1608[0603] 167.132,110.236 r270 bottom
R129 "Res Semi" 1608[0603] 111.76,174.244 r90 bottom
R130 "Res Semi" 1608[0603] 118.074,174.244 r90 bottom
R131 "Res Semi" 1608[0603] 139.7,103.594 r180 bottom
R132 "Res Semi" 1608[0603] 151.822,103.594 r180 bottom
R133 "Res Semi" 1608[0603] 138.838,175.2 r270 bottom
R134 "Res Semi" 1608[0603] 173.722,109.99 r90 top
R135 "Res Semi" 1608[0603] 123.692,174.244 r90 bottom
R136 "Res Semi" 1608[0603] 85.344,185.59 r180 bottom
R137 "Res Semi" 1608[0603] 191.008,176.784 r0 bottom
R138 "Res Semi" 1608[0603] 85.344,179.982 r180 bottom
R139 "Res Semi" 1608[0603] 191.008,182.372 r0 bottom
R140 "Res Semi" 1608[0603] 85.344,174.244 r180 bottom
R141 "Res Semi" 1608[0603] 191.008,188 r0 bottom
R142 "Res Semi" 1608[0603] 85.344,146.942 r180 bottom
R143 "Res Semi" 1608[0603] 191.008,138.684 r0 bottom
R144 "Res Semi" 1608[0603] 85.344,141.344 r180 bottom
R145 "Res Semi" 1608[0603] 191.008,144.272 r0 bottom
R146 "Res Semi" 1608[0603] 85.344,135.636 r180 bottom
R147 "Res Semi" 1608[0603] 191.008,149.91 r0 bottom
R148 "Res Semi" 1608[0603] 153.416,110.236 r180 top
R149 "Res Semi" 1608[0603] 198.12,192.532 r270 bottom
R150 "Res Semi" 1608[0603] 201.168,192.532 r270 top
R151 "Res Semi" 1608[0603] 139.7,102.13 r180 bottom
R152 "Res Semi" 1608[0603] 151.822,102.13 r180 bottom
R153 "Res Semi" 1608[0603] 140.362,175.2 r270 bottom
R154 "Res Semi" 1608[0603] 175.246,109.99 r90 top
R155 "Res Semi" 1608[0603] 185.42,188.468 r180 bottom
R156 "Res Semi" 1608[0603] 153.416,112.776 r90 bottom
R157 "Res Semi" 1608[0603] 158.496,109.728 r180 bottom
R158 "Res Semi" 1608[0603] 160.846,103.632 r0 bottom
R159 "Res Semi" 1608[0603] 180.848,188.468 r180 bottom
R160 "Res Semi" 1608[0603] 177.292,188.468 r0 bottom
R171 "Res Semi" 1608[0603] 139.7,100.666 r180 bottom
R172 "Res Semi" 1608[0603] 151.822,100.666 r180 bottom
R173 "Res Semi" 1608[0603] 141.886,175.2 r270 bottom
R174 "Res Semi" 1608[0603] 176.77,109.99 r90 top
R333 "Res Semi" 2012[0805] 145.796,168.656 r270 top
R341 "R.S" 2012[0805] 169.164,170.18 r180 top
R342 "Res Semi" 2012[0805] 158.012,165.912 r180 top
R343 "Res Semi" 2012[0805] 158.012,167.944 r180 top
R345 "Res Semi" 2012[0805] 175.26,163.214 r0 bottom
R346 "Res Semi" 2012[0805] 175.26,167.278 r0 bottom
R(rst) "Res1" 2012[0805] 128.434,134.802 r90 bottom
R_Buzz "Res Semi" 2012[0805] 159.004,107.188 r90 top
R_D_REV "Res2" 2012[0805] 108.204,99.06 r0 bottom
R_done_led "Res Semi" 2012[0805] 165.758,129.828 r270 top
RST_CAP_1 "Cap" 3216[1206] 123.616,137.58 r0 bottom
S2D3 "SN74HC541DW" PW020_N 173.228,125.476 r270 top
S4 "SW-PB" SPST-2#1 122.428,134.63 r0 top
S_D_1 "SW-PB" SPST-2#2 130.33,187.984 r270 top
S_D_2 "SW-PB" SPST-2#2 134.862,187.984 r270 top
S_D_3 "SW-PB" SPST-2#2 139.434,187.984 r270 top
S_D_4 "SW-PB" SPST-2#2 144.006,187.984 r270 top
S_ID "SW-DIP4" DIP-8 139.364,103.346 r270 top
S_SET "SW-DIP4" DIP-8 151.276,103.346 r270 top
telecontrolli "Header 8X2A" RXQ2 164.592,106.68 r0 top
U1 "SN74HC541DW" PW020_N 95.504,157.48 r0 bottom
U2 "SN74HC541DW" PW020_N 97.028,180.848 r0 bottom
U3 "SN74HC541DW" PW020_N 168.656,180.848 r180 top
U4 "SN74HC541DW" PW020_N 178.308,144.78 r180 bottom
U5 "XC3S400-5TQ144C" TQ144_L 138.684,148.844 r0 top
U6 "MAX4427CSA" NSO8_L 88.906,187.778 r180 top
U7 "MAX4427CSA" NSO8_L 114.638,170.775 r90 top
U8 "MAX4427CSA" NSO8_L 120.226,170.775 r90 top
U9 "MAX4427CSA" NSO8_L 187.49,174.678 r0 top
U10 "MAX4427CSA" NSO8_L 125.814,170.775 r90 top
U11 "MAX4427CSA" NSO8_L 187.49,180.248 r0 top
U12 "MAX4427CSA" NSO8_L 88.906,149.116 r180 top
U13 "MAX4427CSA" NSO8_L 187.49,185.856 r0 top
U14 "MAX4427CSA" NSO8_L 88.906,143.56 r180 top
U15 "MAX4427CSA" NSO8_L 187.49,136.552 r0 top
U16 "MAX4427CSA" NSO8_L 88.906,182.226 r180 top
U17 "MAX4427CSA" NSO8_L 187.49,142.122 r0 top
U18 "MAX4427CSA" NSO8_L 88.906,176.59 r180 top
U19 "MAX4427CSA" NSO8_L 187.49,147.69 r0 top
U20 "MAX4427CSA" NSO8_L 88.906,138.05 r180 top
U21 "M25P80-VMW6" NSO8_L 149.352,128.016 r90 bottom
U22 "MAX4427CSA" NSO8_L 144.272,174.752 r90 top
U27 "XCF04SVO20C" VO20_N 166.348,164.876 r0 top
U36 "M25P80-VMW6" SO8 132.08,174.752 r0 top
VR_1.2 "LF12ABDT" TO-252 117.348,107.696 r180 top
VR_2.5 "LF25ABDT" TO-252 128.804,107.696 r180 top
VR_3.3 "LT1585ACM-1.5" 936-03 140.208,120.534 r180 top
X1 "QSMO_4200" QSMO_4200 142.22,169.164 r180 top

## Footprints (in the part's own frame and the unit in brackets; to place one, negate y for a bottom-side part, rotate by r counter-clockwise, add the part's x,y. Pads: shape width x height; smd on the part's side, far side on the other; paste and mask are expansions set on the pad)
3.2X1.6X1.1#1 [mm] "SMT LED; 2 Flat Leads"
  rect 1.5x2.5 smd: 1(-1.75,0) 2(1.75,0)
  silkscreen extent -2.9,-1.15 3.2,1.15
3.2X1.6X1.1#2 [mm] "SMT LED; 2 Flat Leads"
  rect 1.5x1.5 smd: 1(-1.75,0) 2(1.75,0)
  silkscreen extent -2.9,-1.15 3.2,1.15
936-03 [mm] "D2-PAK/TO-263-AB; 3 Leads (1 Cropped); Body 14.7 (inc. leads) x 10.2 mm (LxW max)"
  rect 1x2.6 smd: 1(-2.54,-5.25) 3(2.54,-5.25)
  rect 10.2x7.3 smd: 4(0,5.25)
  silkscreen extent -5.4,-6.45 5.4,8.8
1608[0603] [mm] "Chip Capacitor; Body 1.6 x 0.8 mm (LxW typ)"
  rect 1.1x1 smd: 1(-0.85,0) 2(0.85,0)
2012[0805] [mm] "Chip Resistor; Body 2.0 x 1.3 mm (LxW typ)"
  rect 1.3x1.5 smd: 1(-0.95,0) 2(0.95,0)
3216[1206] [mm] "Chip Resistor; Body 3.2 x 1.6 mm (LxW typ)"
  rect 1.6x1.8 smd: 1(-1.4,0) 2(1.4,0)
  silkscreen extent -0.3,-0.8 0.3,0.8
6332[2512] [mm] "Chip Resistor; Body 6.3 x 3.2 mm (LxW typ)"
  rect 1.8x3.2 smd: 1(-2.8,0) 2(2.8,0)
  silkscreen extent -1.6,-1.5 1.6,1.5
Antenna [mm]
  round 2.3 hole 1.5: 1(2.591,2.5) 2(2.591,-2.5) 3(0.051,0) 4(-2.489,-2.5) 5(-2.489,2.5)
  silkscreen extent -4.27,-4.15 4.37,4.23
C0805 [mm] "Chip Capacitor; Body 2.0 x 1.2 mm (LxW typ)"
  rect 1.3x1.5 smd: 1(-0.95,0) 2(0.95,0)
  silkscreen extent -1.9,-0.65 -1.9,0.65
C1206 [mm] "Chip Capacitor; Body 3.2 x 1.6 mm (LxW typ)"
  rect 1.6x1.8 smd: 1(-1.4,0) 2(1.4,0)
  silkscreen extent -0.3,-0.8 0.3,0.8
CAPPR5-5x5#1 [mm] "Capacitor, Electrolytic, Radial; Body 5 x 5 mm (Dia.xH typ); Pin Spacing 5 mm (typ)"
  rect 2x2 hole 1.2: 1(-2.5,0)
  round 2 hole 1.2: 2(2.5,0)
  silkscreen extent -2.26,-2.5 2.27,2.5
CAPPR5-5x5#2 [mm] "Capacitor, Electrolytic, Radial; Body 5 x 5 mm (Dia.xH typ); Pin Spacing 5 mm (typ)"
  rect 1.8x1.8 hole 1: 1(-2.5,0)
  round 1.8 hole 1: 2(2.5,0)
  silkscreen extent -2.26,-2.5 2.27,2.5
DIP-8 [mm] "DIP; 8 Leads; Row Spacing 7.62 mm; Pitch 2.54 mm"
  rect 1.5x1.5 hole 0.9: 1(-3.81,-3.81)
  round 1.5 hole 0.9: 2(-1.27,-3.81) 3(1.27,-3.81) 4(3.81,-3.81) 5(3.81,3.81) 6(1.27,3.81) 7(-1.27,3.81) 8(-3.81,3.81)
  silkscreen extent -5.15,-2.65 5.15,2.65
DO-41 [mm] "Diode, Axial; Body 5.2 x 2.7 mm (LxDia. max), Lead Dia. 0.86 mm (max)"
  round 2.2 hole 1.4: 1(-5.23,0)
  rect 2.2x2.2 hole 1.4: 2(7.23,0)
  silkscreen extent -2.65,-1.42 2.75,1.4
HDR1X2 [mm] "Connector; Header; 2 Position"
  rect 3x3 hole 2: 1(-2.54,0)
  round 3 hole 2: 2(2.54,0)
  silkscreen extent -1.27,-1.27 3.81,1.27
HDR1X3 [mm] "Connector; Header; 3 Position"
  rect 1.8x1.8 hole 1.1: 1(0,0)
  round 1.8 hole 1.1: 2(2.54,0) 3(5.08,0)
  silkscreen extent -1.27,-1.27 6.35,1.27
HDR1X4#1 [mm] "Connector; Header; 4 Position"
  rect 2x2 hole 1.3: 1(0,0)
  round 0 all layers, no hole: 2(2.54,0) 3(5.08,0)
  round 2 hole 1.3: 4(7.62,0)
  silkscreen extent -1.27,-1.27 8.89,1.27
HDR1X4#2 [mm] "Connector; Header; 4 Position"
  rect 1.5x1.5 hole 0.9: 1(0,0)
  round 1.5 hole 0.9: 2(2.54,0) 3(5.08,0) 4(7.62,0)
  silkscreen extent -1.27,-1.27 8.89,1.27
HDR1X4#3 [mm] "Connector; Header; 4 Position"
  rect 1.8x1.8 hole 1.1: 1(0,0)
  round 1.8 hole 1.1: 2(2.54,0) 3(5.08,0) 4(7.62,0)
  silkscreen extent -1.27,-1.27 8.89,1.27
HDR1X5 [mm] "Connector; Header; 5 Position"
  rect 1.5x1.5 hole 0.9: 1(0,0)
  round 1.5 hole 0.9: 2(2.54,0) 3(5.08,0) 4(7.62,0) 5(10.16,0)
  silkscreen extent -1.27,-1.27 11.43,1.27
HDR1X6 [mm] "Connector; Header; 6 Position"
  rect 1.8x1.8 hole 1.1: 1(0,0)
  round 1.8 hole 1.1: 2(2.54,0) 3(5.08,0) 4(7.62,0) 5(10.16,0) 6(12.7,0)
  silkscreen extent -1.27,-1.27 13.97,1.27
HDR1X8#1 [mm] "Connector; Header; 8 Position"
  rect 1.8x1.8 hole 1.1: 1(0,0)
  round 1.8 hole 1.1: 2(2.54,0) 3(5.08,0) 4(7.62,0) 5(10.16,0) 6(12.7,0) 7(15.24,0) 8(17.78,0)
  silkscreen extent -1.27,-1.27 19.05,1.27
HDR1X8#2 [mm] "Connector; Header; 8 Position"
  rect 1.5x1.5 hole 0.9: 1(0,0)
  round 1.5 hole 0.9: 2(2.54,0) 3(5.08,0) 4(7.62,0) 5(10.16,0) 6(12.7,0) 7(15.24,0) 8(17.78,0)
  silkscreen extent -1.27,-1.27 19.05,1.27
HDR2X8 [mm] "Connector; Header; 8x2 Position"
  rect 1.5x1.5 hole 0.9: 1(0,0)
  round 1.5 all layers, no hole: 2(0,2.54)
  round 1.5 hole 0.9: 3(2.54,0) 4(2.54,2.54) 5(5.08,0) 6(5.08,2.54) 7(7.62,0) 8(7.62,2.54) 9(10.16,0) 10(10.16,2.54) 11(12.7,0) 12(12.7,2.54) 13(15.24,0) 14(15.24,2.54) 15(17.78,0) 16(17.78,2.54)
  silkscreen extent -1.27,-1.27 19.05,3.81
Kolang [mm]
  rect 3x3 hole 2: 1(0,0)
  round 3 hole 2: 2(0,4) 3(4,0) 4(4,4) 5(8,0) 6(8,4)
  silkscreen extent -1.91,-1.93 9.88,5.94
MIW5000 [mm]
  round 1.5 hole 0.9: 3(22.86,0) 4(22.86,15.22) 5(20.32,0) 6(20.32,15.22) 17(5.08,0) 21(0,0) 22(0,15.22)
  silkscreen extent -1.35,-1.27 24.64,16.56
NSO8_L [mm] "SOIC, 8-Leads, Body 4.9x3.9mm, Pitch 1.27mm, IPC High Density"
  oval 1.9x0.6 smd: 1(-2.35,1.905) 2(-2.35,0.635) 3(-2.35,-0.635) 4(-2.35,-1.905) 5(2.35,-1.905) 6(2.35,-0.635) 7(2.35,0.635) 8(2.35,1.905)
  silkscreen extent -2.48,-2.5 1,2.88, body extent -1.95,-2.45 1.95,2.45, height 1.75
PW020_N [mm] "TSOP, 20-Leads, Body 6.5x4.4mm, Pitch 0.65mm, IPC Medium Density"
  oval 1.7x0.35 smd: 1(-2.85,2.925) 2(-2.85,2.275) 3(-2.85,1.625) 4(-2.85,0.975) 5(-2.85,0.325) 6(-2.85,-0.325) 7(-2.85,-0.975) 8(-2.85,-1.625) 9(-2.85,-2.275) 10(-2.85,-2.925) 11(2.85,-2.925) 12(2.85,-2.275) 13(2.85,-1.625) 14(2.85,-0.975) 15(2.85,-0.325) 16(2.85,0.325) 17(2.85,0.975) 18(2.85,1.625) 19(2.85,2.275) 20(2.85,2.925)
  silkscreen extent -2.97,-3.3 1.6,3.78, body extent -2.25,-3.3 2.25,3.3, height 1.2
QSMO_4200 [mm] "Surface Mount 40MHz Crystal, 7.5mm x 5mm (LxW)"
  rect 2x2 smd: 1(0,0.4) 2(5.08,0.4) 3(5.08,4.6) 4(0,4.6)
  silkscreen extent -1.19,-1.31 6.22,4.95
RXQ2 [mm]
  round 1.5 hole 0.9: 1(23.284,0) 2(23.284,2.54) 3(23.284,5.08) 4(23.284,7.62) 5(23.284,10.16) 6(23.284,12.7) 7(23.284,15.24) 8(23.284,17.78) 9(0,0) 10(0,2.54) 11(0,5.08) 12(0,7.62) 13(0,10.16) 14(0,12.7) 15(0,15.24) 16(0,17.78)
  silkscreen extent -1.27,-1.27 24.56,19.05
SO8 [mm] "Small Outline; 8 Leads; Body Width 3.9 mm; Pitch 1.27 mm"
  rect 0.6x2.2 smd: 1(-1.905,-2.6) 2(-0.635,-2.6) 3(0.635,-2.6) 4(1.905,-2.6) 5(1.905,2.6) 6(0.635,2.6) 7(-0.635,2.6) 8(-1.905,2.6)
  silkscreen extent -2.88,-2.72 2.5,1.1
SO-8_L [mm] "SOIC, 8-Leads, Body 4.9x3.9mm, Pitch 1.27mm, IPC High Density"
  oval 1.9x0.6 smd: 1(-2.35,1.905) 2(-2.35,0.635) 3(-2.35,-0.635) 4(-2.35,-1.905) 5(2.35,-1.905) 6(2.35,-0.635) 7(2.35,0.635) 8(2.35,1.905)
  silkscreen extent -2.47,-2.5 1,2.88, body extent -1.95,-2.45 1.95,2.45, height 1.75
SOT23_N [mm] "SOT23, 3-Leads, Body 2.9x1.3mm, Pitch 0.95mm, Lead Span 2.3mm, IPC Medium Density"
  rect 1.3x0.6 smd: 1(-1.05,0.95) 2(-1.05,-0.95) 3(1.05,0)
  silkscreen extent -1.18,-1.5 0.7,1.92, body extent -0.7,-1.5 0.7,1.5, height 1.1
SPST-2#1 [mm] "Circuit Breaker; 2 Leads"
  rect 1.85x1.85 hole 1.1: 1(-2.54,0)
  round 1.85 hole 1.1: 2(2.54,0)
  silkscreen extent -4.89,-1.27 4.28,1.27
SPST-2#2 [mm] "Circuit Breaker; 2 Leads"
  rect 2x2 hole 1.3: 1(-2.54,0)
  round 2 hole 1.3: 2(2.54,0)
  silkscreen extent -4.89,-1.27 4.28,1.27
TO-252 [mm] "D-PAK/TO-252-AA; 3 Leads (1 Cropped); Body 10.1 (inc. leads) x 6.6 mm (LxW max)"
  rect 1x2.1 smd: 1(-2.285,-3.375) 3(2.285,-3.375)
  rect 5.4x6.2 smd: 4(0,3.375)
  silkscreen extent -3.08,-4.33 3.08,6.37
TQ144_L [mm] "Thin QFP, 144-Leads, Body 20x20mm, Pitch 0.5mm, IPC High Density"
  oval 1.55x0.25 smd: 1(-10.525,8.75) 2(-10.525,8.25) 3(-10.525,7.75) 4(-10.525,7.25) 5(-10.525,6.75) 6(-10.525,6.25) 7(-10.525,5.75) 8(-10.525,5.25) 9(-10.525,4.75) 10(-10.525,4.25) 11(-10.525,3.75) 12(-10.525,3.25) 13(-10.525,2.75) 14(-10.525,2.25) 15(-10.525,1.75) 16(-10.525,1.25) 17(-10.525,0.75) 18(-10.525,0.25) 19(-10.525,-0.25) 20(-10.525,-0.75) 21(-10.525,-1.25) 22(-10.525,-1.75) 23(-10.525,-2.25) 24(-10.525,-2.75) 25(-10.525,-3.25) 26(-10.525,-3.75) 27(-10.525,-4.25) 28(-10.525,-4.75) 29(-10.525,-5.25) 30(-10.525,-5.75) 31(-10.525,-6.25) 32(-10.525,-6.75) 33(-10.525,-7.25) 34(-10.525,-7.75) 35(-10.525,-8.25) 36(-10.525,-8.75) 73(10.525,-8.75) 74(10.525,-8.25) 75(10.525,-7.75) 76(10.525,-7.25) 77(10.525,-6.75) 78(10.525,-6.25) 79(10.525,-5.75) 80(10.525,-5.25) 81(10.525,-4.75) 82(10.525,-4.25) 83(10.525,-3.75) 84(10.525,-3.25) 85(10.525,-2.75) 86(10.525,-2.25) 87(10.525,-1.75) 88(10.525,-1.25) 89(10.525,-0.75) 90(10.525,-0.25) 91(10.525,0.25) 92(10.525,0.75) 93(10.525,1.25) 94(10.525,1.75) 95(10.525,2.25) 96(10.525,2.75) 97(10.525,3.25) 98(10.525,3.75) 99(10.525,4.25) 100(10.525,4.75) 101(10.525,5.25) 102(10.525,5.75) 103(10.525,6.25) 104(10.525,6.75) 105(10.525,7.25) 106(10.525,7.75) 107(10.525,8.25) 108(10.525,8.75)
  oval 0.25x1.55 smd: 37(-8.75,-10.525) 38(-8.25,-10.525) 39(-7.75,-10.525) 40(-7.25,-10.525) 41(-6.75,-10.525) 42(-6.25,-10.525) 43(-5.75,-10.525) 44(-5.25,-10.525) 45(-4.75,-10.525) 46(-4.25,-10.525) 47(-3.75,-10.525) 48(-3.25,-10.525) 49(-2.75,-10.525) 50(-2.25,-10.525) 51(-1.75,-10.525) 52(-1.25,-10.525) 53(-0.75,-10.525) 54(-0.25,-10.525) 55(0.25,-10.525) 56(0.75,-10.525) 57(1.25,-10.525) 58(1.75,-10.525) 59(2.25,-10.525) 60(2.75,-10.525) 61(3.25,-10.525) 62(3.75,-10.525) 63(4.25,-10.525) 64(4.75,-10.525) 65(5.25,-10.525) 66(5.75,-10.525) 67(6.25,-10.525) 68(6.75,-10.525) 69(7.25,-10.525) 70(7.75,-10.525) 71(8.25,-10.525) 72(8.75,-10.525) 109(8.75,10.525) 110(8.25,10.525) 111(7.75,10.525) 112(7.25,10.525) 113(6.75,10.525) 114(6.25,10.525) 115(5.75,10.525) 116(5.25,10.525) 117(4.75,10.525) 118(4.25,10.525) 119(3.75,10.525) 120(3.25,10.525) 121(2.75,10.525) 122(2.25,10.525) 123(1.75,10.525) 124(1.25,10.525) 125(0.75,10.525) 126(0.25,10.525) 127(-0.25,10.525) 128(-0.75,10.525) 129(-1.25,10.525) 130(-1.75,10.525) 131(-2.25,10.525) 132(-2.75,10.525) 133(-3.25,10.525) 134(-3.75,10.525) 135(-4.25,10.525) 136(-4.75,10.525) 137(-5.25,10.525) 138(-5.75,10.525) 139(-6.25,10.525) 140(-6.75,10.525) 141(-7.25,10.525) 142(-7.75,10.525) 143(-8.25,10.525) 144(-8.75,10.525)
  silkscreen extent -10.65,-9.35 9.35,9.55, body extent -10,-10 10,10, height 1.6
VO20_N [mm] "TSOP, 20-Leads, Body 6.5x4.4mm, Pitch 0.65mm, IPC Medium Density"
  oval 1.7x0.35 smd: 1(-2.85,2.925) 2(-2.85,2.275) 3(-2.85,1.625) 4(-2.85,0.975) 5(-2.85,0.325) 6(-2.85,-0.325) 7(-2.85,-0.975) 8(-2.85,-1.625) 9(-2.85,-2.275) 10(-2.85,-2.925) 11(2.85,-2.925) 12(2.85,-2.275) 13(2.85,-1.625) 14(2.85,-0.975) 15(2.85,-0.325) 16(2.85,0.325) 17(2.85,0.975) 18(2.85,1.625) 19(2.85,2.275) 20(2.85,2.925)
  silkscreen extent -2.97,-3.3 1.6,3.77, body extent -2.25,-3.3 2.25,3.3, height 1.2

## Part data
Antenna Booster: "Header, 5-Pin"
Battery: "Header, 2-Pin"
Buzzer e1 e2 e3 e4 P2: "Header, 4-Pin"
C1 C2 C3 C5 C6 C7 C9 C10 C20 C63 C65 C66 C67 C68 C69 C70 C71 C72 C81 C110 C120 C130 C_ADC C_IR: library part CAP, "Capacitor"
C2(tele) C(tele) RST_CAP_1: "Capacitor"
C4 C_DRIBBLER C_M1 C_M2 C_M3 C_M4 C_MIKONA: library part "Cap Pol1", "Polarized Capacitor (Radial)"
C8 C31 C62: library part "Cap Semi", "Capacitor (Semiconductor SIM Model)"
C11 C12 C13 C14 C15 C16 C17 C18 C19 C22 C23 C24 C25 C26 C27 C28 C29 C30 C32 C33 C34 C35 C36 C37 C38 C39 C40 C41 C42 C43 C44 C45 C46 C47 C48 C49 C50 C51 C52 C53 C54 C55 C56 C57 C58 C59 C60 C61 C64 C73 C74 C75 C76 C77 C78 C79 CnRF: "Capacitor (Semiconductor SIM Model)"
C21: library part C_Dup1
C80 C_1 C_16 C_17 C_19: library part "Cap Pol3", "Polarized Capacitor (Surface Mount)"
D1 D3 D21 D24 D_D_1 D_D_2 D_D_3 D_D_4 D_Done D_REV: "Typical RED, GREEN, YELLOW, AMBER GaAs LED"
D_correction: "1 Amp General Purpose Rectifier"
Dribbler MOTOR_1 MOTOR_2 MOTOR_3 MOTOR_4 nRF: "Header, 8-Pin"
"Gyro & Accel": library part "Header 8X2", "Header, 8-Pin, Dual row"
MinMax: "Header, 12-Pin, Dual row"
P1: "Header, 3-Pin"
P13: "Header, 6-Pin"
P16: "Header, 3-Pin, Dual row"
Q1 Q2 Q3 Q4 Q5 Q6 Q7 Q8 Q9 Q10 Q11 Q12 Q13 Q14 Q15 Q16 Q17 Q18 Q19 Q20 Q21 Q22 Q23 Q24 Q25 Q26 Q27 Q28 Q29 Q30: "HEXFET Power MOSFET"
Q_BUZZ: "NPN Darlington Transistor"
R1 R3 R21 R24 R43 R45 R122 R(rst) R_D_REV: "Resistor"
R2 R2.5 R4 R5 R6 R7 R8 R9 R10 R11 R12 R13 R14 R15 R16 R17 R18 R19 R20 R22 R23 R25 R26 R27 R28 R29 R30 R31 R32 R33 R34 R35 R36 R37 R38 R39 R40 R41 R42 R44 R46 R47 R48 R49 R50 R51 R52 R53 R54 R55 R56 R57 R58 R59 R60 R61 R62 R63 R64 R65 R66 R67 R68 R69 R70 R71 R72 R73 R74 R75 R76 R77 R78 R79 R80 R81 R82 R83 R84 R85 R86 R87 R88 R89 R90 R91 R92 R93 R94 R95 R96 R97 R98 R99 R100 R101 R102 R103 R104 R105 R106 R107 R108 R109 R110 R111 R112 R113 R114 R115 R116 R117 R118 R119 R120 R121 R123 R124 R125 R126 R127 R128 R129 R130 R131 R132 R133 R134 R135 R136 R137 R138 R139 R140 R141 R142 R143 R144 R145 R146 R147 R148 R149 R150 R151 R152 R153 R154 R155 R156 R157 R158 R159 R160 R171 R172 R173 R174 R333 R342 R343 R345 R346 R_Buzz R_done_led: "Semiconductor Resistor"
R341: library part "Res Semi", "Semiconductor Resistor"
S2D3 U1 U2 U3 U4: "Octal Buffer/Driver with 3-State Outputs"
S4 S_D_1 S_D_2 S_D_3 S_D_4: "Switch"
S_ID S_SET: "DIP Switch"
telecontrolli: "Header, 8-Pin, Dual row"
U5: "Spartan-3 1.2V FPGA, 97 User I/Os, 144-Pin TQFP, High Performance, Commercial Grade"
U6 U7 U8 U9 U10 U11 U12 U13 U14 U15 U16 U17 U18 U19 U20 U22: "Dual High-Speed 1.5A MOSFET Driver"
U21 U36: library part M25P10-VMN6, "8 Mbit Flash Serial Prom"
U27: "XCF00S Series, Platform Flash In-System Programmable Configuration 3.3V PROM, 20-Pin TSOP, 4-Megabit, Commercial Grade"
VR_1.2 VR_2.5: "500mA, Very Low Drop (0.45V) Voltage Regulator"
VR_3.3: "5A Low Dropout Fast Response Positive Fixed Voltage Regulator"
X1: "QSMO - 4200 SERIES, 40MHz, SURFACE MOUNT CRYSTAL OSCILLATOR"

## Free pads (board coordinates)
  round 3.5 hole 3.5: 0(61,164.51) 0(68.4,122.21) 0(209.39,122.21) 0(216.79,164.51)

## Via types
v1: diameter 0.7, hole 0.3, Top Layer to Bottom Layer, 308 vias
v2: diameter 1, hole 0.5, Top Layer to Bottom Layer, 66 vias
v3: diameter 0.9, hole 0.5, Top Layer to Bottom Layer, 38 vias
v4: diameter 0.99, hole 0.5, Top Layer to Bottom Layer, 30 vias
v5: diameter 0.6, hole 0.3, Top Layer to Bottom Layer, 2 vias

## Nets (pads, with @x,y where several pads share a name; then routed paths per layer and width w, separated by ;. In a path a pad name is that pad's centre, name@x,y a point inside that pad or via, vN(x,y) a via of type N, cw(c..) or ccw(c..) an arc to the next point about the centre after c; other vN are vias at no path point)
BOOSTER_READY: Booster.4 U3.6 | length 12.4
  Top Layer w0.3: v1(169.18,185.46) 169.18,182.14 170.147,181.173 U3.6@171.506,181.173
  Bottom Layer w0.4: Booster.4@167.132,191.008 167.132,187.508 v1(169.18,185.46)
BUZZER: R_Buzz.1 S2D3.12 | length 26.7
  Top Layer w0.2: R_Buzz.1@159.004,106.238 160.292,104.95 165.09,104.95 169.38,109.24 169.38,113.51 170.95,115.08 S2D3.12@170.95,122.65
C_SPI_CLK: R115.1 U5.130 U36.6 | length 25.4
  Top Layer w0.2: U36.6@132.69,177.36 132.69,176.06 133.34,175.41 v1(134.26,175.41) 135.04,174.63 135.04,163.04 136.934,161.146 U5.130@136.934,159.369
  Bottom Layer w0.4: v1(134.26,175.41) 135.01,174.66 135.01,172.92 136.162,171.768 R115.1@136.162,171.062
C_SPI_DIN: R110.2 U5.129 U36.5 | length 27.4
  Top Layer w0.2: U36.5@134.1,177.67 134.1,177.42 135.59,175.93 135.59,163.26 137.434,161.416 U5.129@137.434,159.369
  Bottom Layer w0.4: v1(134.373,177.147) 135.91,175.61 135.91,173.16 136.21,172.86 136.71,172.86 137.686,171.884 R110.2@137.686,171.062
C_SPI_DOUT: U5.131 U36.2 | length 14.8
  Top Layer w0.2: U36.2@131.45,172.14 131.45,169.67 134.46,166.66 134.46,162.84 136.434,160.866 U5.131@136.434,159.369
C_SPI_SEL_FLSH: R109.2 U5.132 U36.1 | length 19.7
  Top Layer w0.2: U36.1@130.18,172.13 130.18,169.57 133.91,165.84 133.91,162.66 135.934,160.636 U5.132@135.934,159.369
  Bottom Layer w0.4: v1@131.114,168.636 133.54,171.062 R109.2@134.638,171.062
  other v1: 131.1,168.65
CCLK: R31.1 U5.72 U27.3 | length 65.2
  Top Layer w0.2: U5.72@147.434,138.319 148.051,138.319 v1(149.29,137.08)
  Top Layer w0.3: v1@161.88,167.17 161.88,166.9 162.279,166.501 U27.3@163.498,166.501
  Bottom Layer w0.3: v1(149.29,137.08) 158.68,146.47 158.68,149.17 159.97,150.46 163.2,150.46 172.92,160.18 172.92,167.71 168.2,172.43 164.04,172.43 161.58,169.97 161.58,167.46 v1(161.87,167.17)
  Bottom Layer w0.5: 173.08,165.19 R31.1@174.31,165.19
CHARGE_PULSE: Booster.3 R118.2 U5.113 | length 49.3
  Top Layer w0.2: U5.113@145.434,159.369 145.434,162.304 151.68,168.55 151.68,176.61 156.43,181.36 156.43,185.47 159.59,188.63 162.86,188.63 164.59,190.36 Booster.3@164.59,190.96
  Bottom Layer w0.4: Booster.3@164.592,191.008 164.592,188.698 167.424,185.866 R118.2@167.424,184.326
CHIP_PULSE: Booster.2 R117.2 U5.116 | length 48.3
  Top Layer w0.2: U5.116@143.934,159.369 143.934,161.6 151.18,168.846 151.18,176.82 155.79,181.43 155.79,186.06 159.12,189.39 160.9,189.39 161.88,190.37 161.88,190.64 Booster.2@161.505,191.015
  Bottom Layer w0.4: Booster.2@162.052,191.008 162.052,189.438 165.392,186.098 R117.2@165.392,184.326
CLK: U5.128 X1.3 | length 5.5
  Top Layer w0.2: X1.3@137.14,164.564 137.934,163.77 U5.128@137.934,159.369
CTS: nRF.6 R158.2 telecontrolli.9 U5.68 | length 61.9
  Top Layer w0.2: U5.68@145.434,138.319 145.434,134.766 146.54,133.66 158.17,133.66 166.74,125.09 166.74,108.828 telecontrolli.9@164.592,106.68
  Bottom Layer w0.4: R158.2@161.71,103.646 161.71,105.25 ; nRF.6@162.56,111.76 161.34,111.76 161.04,111.46 161.04,105.92 161.71,105.25 ; telecontrolli.9@164.592,106.68 164.592,105.742 164.1,105.25 161.71,105.25
D_IO1: R(rst).2 RST_CAP_1.2 S4.2 U5.40 | length 15.6
  Top Layer w0.2: S4.2@124.968,134.63 128.98,134.63 131.434,137.084 U5.40@131.434,138.319
  Bottom Layer w0.5: RST_CAP_1.2@124.968,137.532 S4.2@124.968,134.63 126.09,135.752 128.434,135.752
D_IO2: R111.1 S_ID.8 U5.41 | length 43.7
  Top Layer w0.2: U5.41@131.934,138.319 131.934,134.596 138.74,127.79 138.74,122.99 141.75,119.98 145.13,119.98 146.07,119.04 146.07,110.98 143.24,108.15 S_ID.8@143.24,107.09
  Bottom Layer w0.4: R111.1@140.55,105.058 142.612,107.12 S_ID.8@143.16,107.12
D_IO3: R131.1 S_ID.7 U5.44 | length 45.9
  Top Layer w0.2: U5.44@133.434,138.319 133.434,133.816 139.28,127.97 139.28,123.18 141.98,120.48 145.34,120.48 146.582,119.238 146.582,110.712 144.61,108.74 144.61,105.26 143.97,104.62 S_ID.7@143.31,104.62
  Bottom Layer w0.4: R131.1@140.55,103.594 142.152,103.594 S_ID.7@143.174,104.616
D_IO4: R151.1 S_ID.6 U5.46 | length 48.1
  Top Layer w0.2: U5.46@134.434,138.319 134.434,133.536 139.91,128.06 139.91,123.45 142.36,121 145.53,121 147.1,119.43 147.1,110.52 145.19,108.61 145.19,103.17 144.09,102.07 S_ID.6@143.15,102.07
  Bottom Layer w0.4: R151.1@140.55,102.09 S_ID.6@143.12,102.09
D_IO5: R171.1 S_ID.5 U5.47 | length 51.2
  Top Layer w0.2: U5.47@134.934,138.319 134.934,133.746 140.41,128.27 140.41,123.68 141.3,122.79 144.88,122.79 147.6,120.07 147.6,110.11 145.7,108.21 145.7,102.04 143.185,99.525 S_ID.5@143.14,99.48
  Bottom Layer w0.4: R171.1@140.55,100.666 141.816,99.4 S_ID.5@143.19,99.4
D_IO6: R172.1 S_SET.5 U5.50 | length 52.2
  Top Layer w0.2: U5.50@136.434,138.319 136.434,132.976 140.865,128.545 143.225,128.545 149.74,122.03 149.74,106.61 152.81,103.54 152.81,100.05 153.33,99.53 S_SET.5@155.05,99.53
  Bottom Layer w0.4: R172.1@152.859,100.865 152.859,100.031 153.45,99.44 S_SET.5@155.11,99.44
D_IO7: R152.1 S_SET.6 U5.51 | length 47.2
  Top Layer w0.2: U5.51@136.934,138.319 136.934,133.216 141.105,129.045 143.435,129.045 150.26,122.22 150.26,107.17 155.07,102.36 S_SET.6@155.07,102.09
  Bottom Layer w0.4: R152.1@152.9,102.13 S_SET.6@155.04,102.13
D_IO8: R132.1 S_SET.7 U5.52 | length 45.1
  Top Layer w0.2: U5.52@137.434,138.319 137.434,133.426 141.245,129.615 143.615,129.615 150.76,122.47 150.76,108.87 155.05,104.58 S_SET.7@155.06,104.57
  Bottom Layer w0.4: R132.1@152.93,103.48 153.06,103.61 154.2,103.61 S_SET.7@155.13,104.54
D_IO9: nRF.4 R148.2 R156.1 U5.53 | length 50.3
  Top Layer w0.2: U5.53@137.934,138.319 137.934,133.696 141.475,130.155 143.835,130.155 151.26,122.73 151.26,111.542 v1(152.566,110.236)
  Bottom Layer w0.2: v1(152.566,110.236) 152.566,111.076 R156.1@153.416,111.926
  Bottom Layer w0.4: v1(152.566,110.236) 153.886,110.236 160.49,116.84 nRF.4@162.56,116.84
D_IO10: U5.55 U21.6 | length 16.2
  Top Layer w0.2: U5.55@138.934,138.319 138.934,133.406 141.68,130.66 147.76,130.66 v5(148.7,129.72)
D_IO11: R119.2 U5.56 U21.7 | length 24.5
  Top Layer w0.2: U5.56@139.434,138.319 139.434,133.616 141.89,131.16 149.7,131.16 149.97,130.89 v5@149.97,130.39
  Bottom Layer w0.4: U21.7@149.987,130.366 149.987,131.987 150.27,132.27 154.54,132.27 154.774,132.036 R119.2@154.774,131.064
  other v5: 149.98,130.38